# EAGLE board SparkFun NEO-D9S-Panel (EAGLE 9.6.2), part 1 of 2
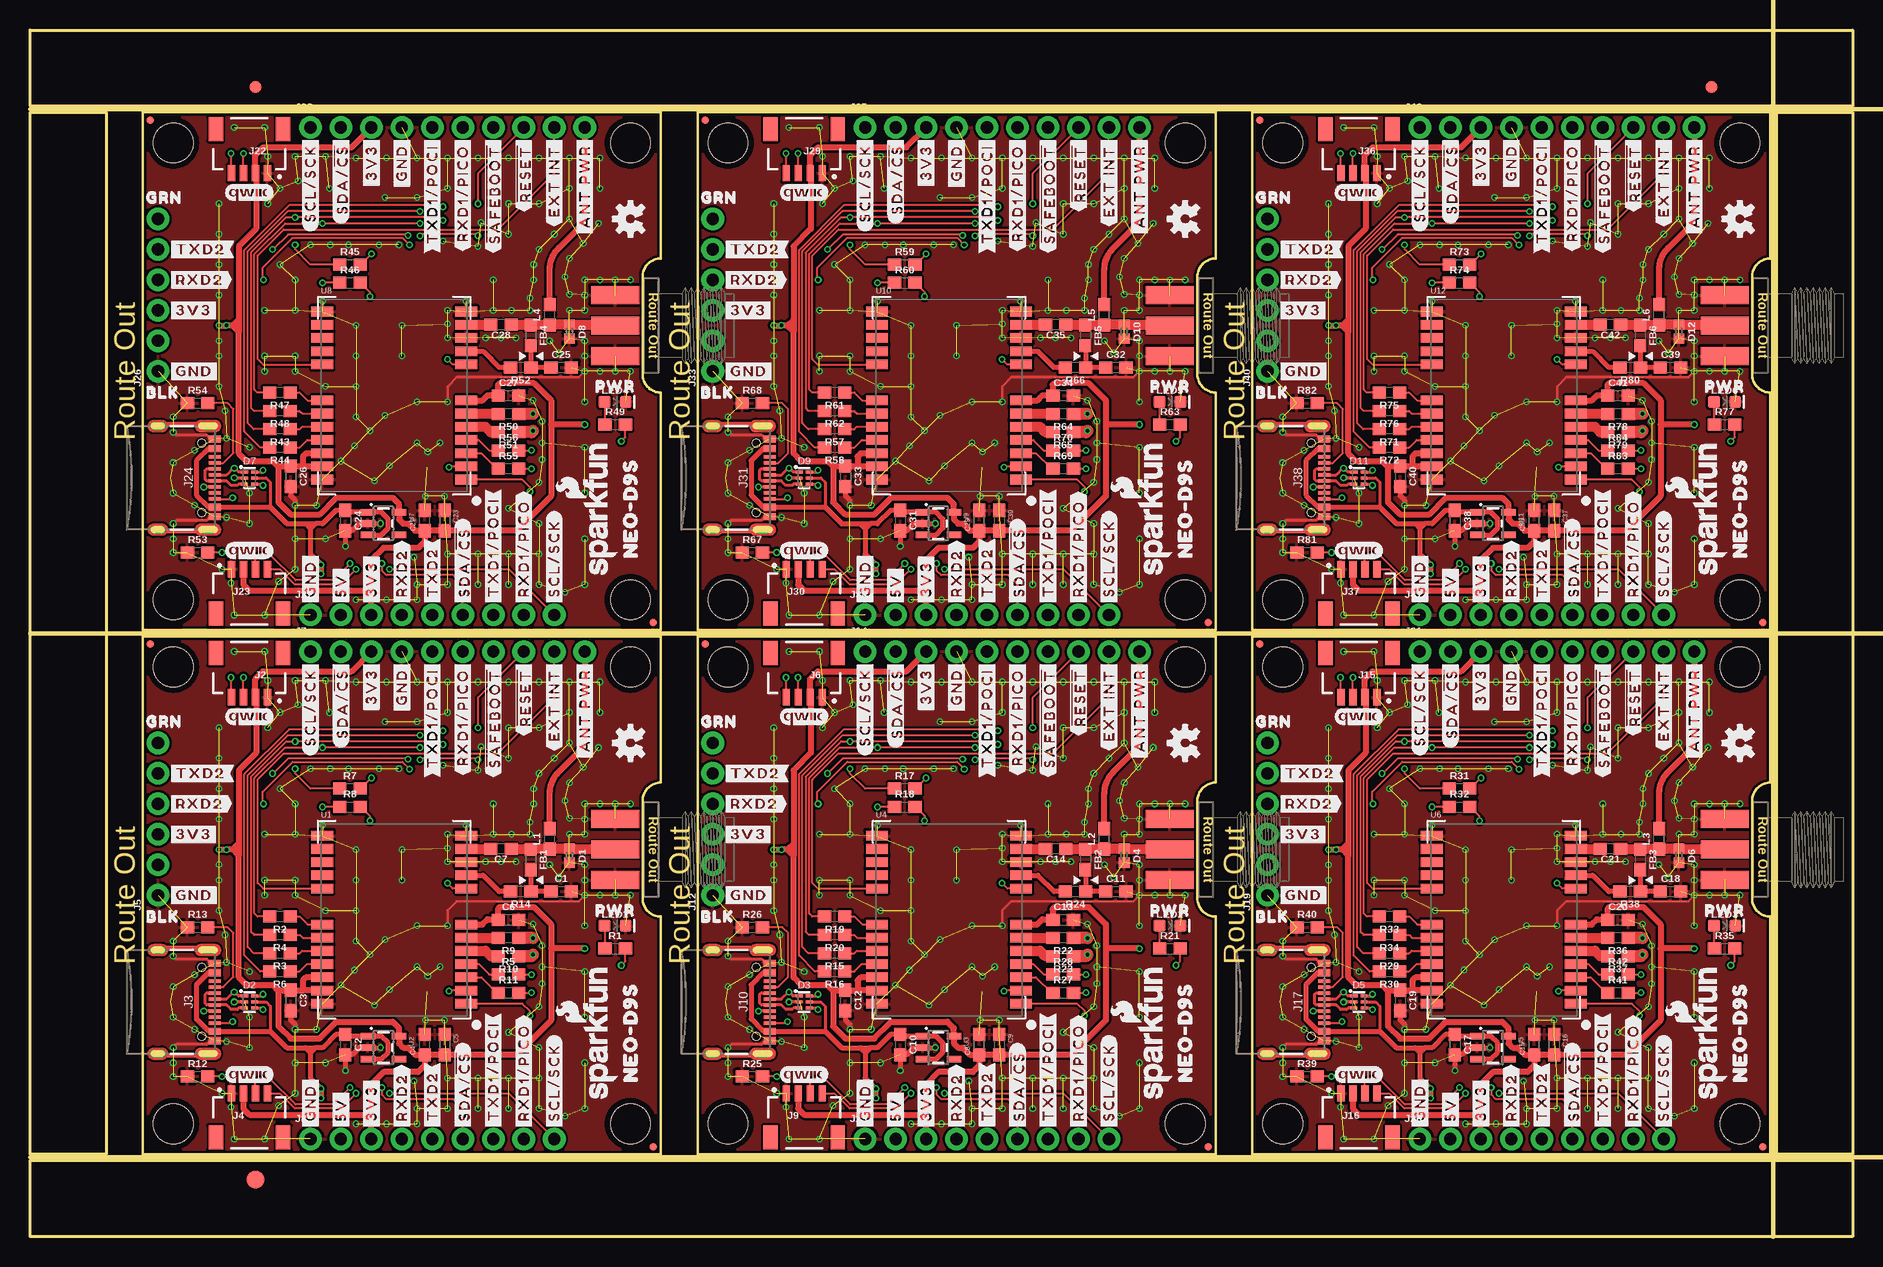
[diagram p0: board, top side]
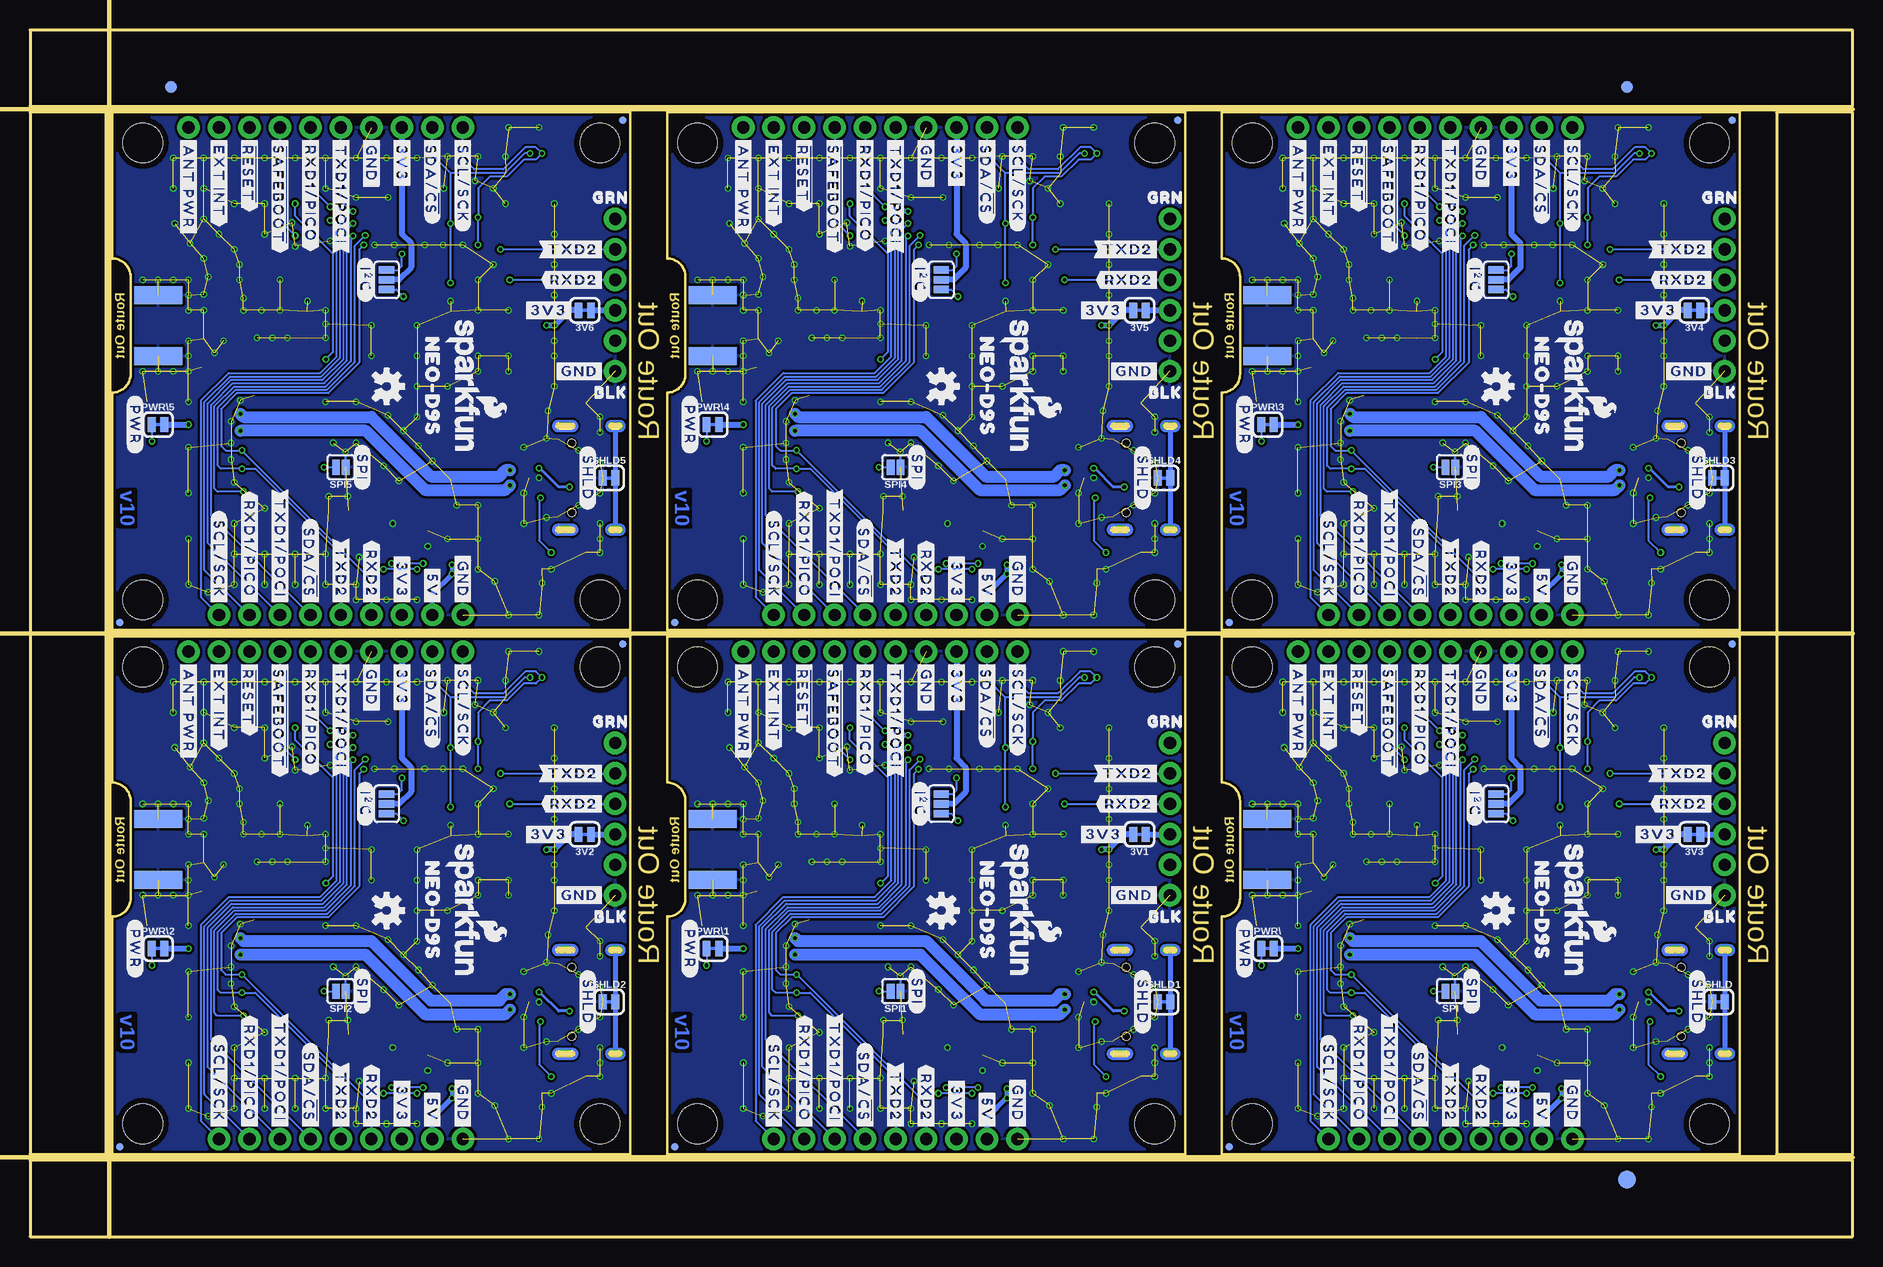
[diagram p1: board, bottom side, seen from below]

Size 151.89 x 100.58 mm. Coordinates in mm from the lower left corner, seen from the top.
Outline: 9.4,6.86 9.4,50.04 52.58,50.04 52.58,37.85 arc90 51.05,36.32 51.05,28.19 arc90 52.58,26.67 52.58,6.86 9.4,6.86
Outline: 55.63,6.86 55.63,50.04 98.81,50.04 98.81,37.85 arc90 97.28,36.32 97.28,28.19 arc90 98.81,26.67 98.81,6.86 55.63,6.86
Outline: 101.85,6.86 101.85,50.04 145.03,50.04 145.03,37.85 arc90 143.51,36.32 143.51,28.19 arc90 145.03,26.67 145.03,6.86 101.85,6.86
Outline: 9.4,50.55 9.4,93.73 52.58,93.73 52.58,81.53 arc90 51.05,80.01 51.05,71.88 arc90 52.58,70.36 52.58,50.55 9.4,50.55
Outline: 55.63,50.55 55.63,93.73 98.81,93.73 98.81,81.53 arc90 97.28,80.01 97.28,71.88 arc90 98.81,70.36 98.81,50.55 55.63,50.55
Outline: 101.85,50.55 101.85,93.73 145.03,93.73 145.03,81.53 arc90 143.51,80.01 143.51,71.88 arc90 145.03,70.36 145.03,50.55 101.85,50.55
Outline: 0,6.35 151.89,6.35 151.89,0 0,0 0,6.35
Outline: 145.54,93.73 151.89,93.73 151.89,6.86 145.54,6.86 145.54,93.73
Outline: 0,100.58 151.89,100.58 151.89,94.23 0,94.23 0,100.58
Outline: 0,93.73 6.35,93.73 6.35,6.86 0,6.86 0,93.73
Copper layers (1*16): Top 0.035mm / dielectric 1.5mm / Bottom 0.035mm
Design rules "SparkFun NEO-D9S": minimum track width 5mil, minimum drill 0.3mm, track to track 5mil, track to pad 5mil, pad to pad 5mil, via to via 5mil, smd to smd 5mil, copper to edge 7mil, drill to drill 7mil, minimum pad ring 5mil, minimum via ring 5mil, stop-mask expansion 2.5mil, vias tented up to drill 25mil, thermal gap 10mil
Net classes: 2 3.3V: width 0.508 mm
tRestrict: 12 lines
Milling: 4 lines

## Footprints (pad centres in the part's own frame; a part is rotated, then mirrored left to right if it is on the bottom)
SMT-JUMPER_2_NC_TRACE_SILK = smd 0.66 x 1.27: 1 -0.521,0; 2 0.521,0
0603 = smd 1.1 x 1: 1 -0.85,0; 2 0.85,0
0402 = smd 0.85 x 0.9: 1 -0.58,0; 2 0.58,0
SOT886 = smd 0.61 x 0.25: 1 -0.405,0.5 | smd 0.56 x 0.25: 2 -0.43,0; 3 -0.43,-0.5; 4 0.43,-0.5; 5 0.43,0; 6 0.43,0.5
FIDUCIAL-1X2 = smd 1 x 1: 1 0,0
FIDUCIAL-1.5X3 = smd 1.5 x 1.5: 1 0,0
SMT-JUMPER_3_NO_SILK = smd 0.635 x 1.27: 1 -0.813,0; 2 0,0; 3 0.813,0
SMA-EDGE = smd 1.5 x 4: GND@0 -2.54,0; GND@1 2.54,0; SIG 0,0 | smd 1.5 x 4 bottom: GND@2 -2.54,0; GND@3 2.54,0
JST04_1MM_RA = smd 0.6 x 1.35: 1 -1.5,0; 2 -0.5,0; 3 0.5,0; 4 1.5,0 | smd 1.2 x 2: NC1 2.8,-3.675; NC2 -2.8,-3.675
USB-C-16P-2LAYER-PADS = smd 0.3 x 1: A5 -1.25,-0.34; A6 -0.25,-0.34; A7 0.25,-0.34; A8 1.25,-0.34; B5 1.75,-0.34; B6 0.75,-0.34; B7 -0.75,-0.34; B8 -1.75,-0.34 | smd 0.6 x 1: GND -3.225,-0.34; GND2 3.225,-0.34; VBUS1 -2.45,-0.34; VBUS2 2.45,-0.34 | drill 0.4 pad 0.6 long: SHLD1 -4.318,-0.915; SHLD2 4.318,-0.915; SHLD3 -4.318,-5.095; SHLD4 4.318,-5.095 | hole 0.65: -2.89,-1.445; 2.89,-1.445
1X06_NO_SILK = drill 1.016 pad 1.88: 1 0,0; 2 2.54,0; 3 5.08,0; 4 7.62,0; 5 10.16,0; 6 12.7,0
1X10_NO_SILK = drill 1.016 pad 1.88: 1 0,0; 2 2.54,0; 3 5.08,0; 4 7.62,0; 5 10.16,0; 6 12.7,0; 7 15.24,0; 8 17.78,0; 9 20.32,0; 10 22.86,0
1X09_NO_SILK = drill 1.016 pad 1.88: 1 0,0; 2 2.54,0; 3 5.08,0; 4 7.62,0; 5 10.16,0; 6 12.7,0; 7 15.24,0; 8 17.78,0; 9 20.32,0
STAND-OFF = hole 3.302: 0,0
MICRO-FIDUCIAL = smd 0.635 x 0.635: 1 0,0
0603_NO-CREAM = smd 1.1 x 1: 1 -0.85,0; 2 0.85,0
LED-0603 = smd 1 x 1: A -0.877,0; C 0.877,0
SMT-JUMPER_2_NO_SILK = smd 0.635 x 1.27: 1 -0.406,0; 2 0.406,0
NEO-M9N/M8T/M8U/D9S = smd 1.8 x 0.8: 1 6,-7; 2 6,-5.9; 3 6,-4.8; 4 6,-3.7; 5 6,-2.6; 6 6,-1.5; 7 6,-0.4; 8 6,2.6; 9 6,3.7; 10 6,4.8; 11 6,5.9; 12 6,7; 13 -6,7; 14 -6,5.9; 15 -6,4.8; 16 -6,3.7; 17 -6,2.6; 18 -6,-0.4; 19 -6,-1.5; 20 -6,-2.6; 21 -6,-3.7; 22 -6,-4.8; 23 -6,-5.9; 24 -6,-7
SOT23-5 = smd 0.55 x 1.2: 1 -0.95,-1.3; 2 0,-1.3; 3 0.95,-1.3; 4 0.95,1.3; 5 -0.95,1.3

## Placement (x,y rotation side)
3V1  JUMPER-SMT_2_NC_TRACE_SILK  [SMT-JUMPER_2_NC_TRACE_SILK]  59.44,33.53 180 bottom
3V2  JUMPER-SMT_2_NC_TRACE_SILK  [SMT-JUMPER_2_NC_TRACE_SILK]  105.66,33.53 180 bottom
3V3  JUMPER-SMT_2_NC_TRACE_SILK  [SMT-JUMPER_2_NC_TRACE_SILK]  13.21,33.53 180 bottom
3V4  JUMPER-SMT_2_NC_TRACE_SILK  [SMT-JUMPER_2_NC_TRACE_SILK]  13.21,77.22 180 bottom
3V5  JUMPER-SMT_2_NC_TRACE_SILK  [SMT-JUMPER_2_NC_TRACE_SILK]  59.44,77.22 180 bottom
3V6  JUMPER-SMT_2_NC_TRACE_SILK  [SMT-JUMPER_2_NC_TRACE_SILK]  105.66,77.22 180 bottom
C1  47pF  [0603]  44.26,28.77 0 top
C2  1.0uF  [0603]  26.29,16 270 top
C3  1.0uF  [0603]  21.72,19.68 270 top
C4  1.0uF  [0603]  32.89,16 90 top
C5  0.1uF  [0603]  34.54,16 270 top
C6  1.0uF  [0603]  39.88,26.42 0 top
C7  47pF  [0603]  39.24,32.32 180 top
C8  1.0uF  [0603]  79.12,16 90 top
C9  0.1uF  [0603]  80.77,16 270 top
C10  1.0uF  [0603]  72.52,16 270 top
C11  47pF  [0603]  90.49,28.77 0 top
C12  1.0uF  [0603]  67.94,19.68 270 top
C13  1.0uF  [0603]  86.11,26.42 0 top
C14  47pF  [0603]  85.47,32.32 180 top
C15  1.0uF  [0603]  125.35,16 90 top
C16  0.1uF  [0603]  127,16 270 top
C17  1.0uF  [0603]  118.74,16 270 top
C18  47pF  [0603]  136.72,28.77 0 top
C19  1.0uF  [0603]  114.17,19.68 270 top
C20  1.0uF  [0603]  132.33,26.42 0 top
C21  47pF  [0603]  131.7,32.32 180 top
C22  1.0uF  [0603]  32.89,59.69 90 top
C23  0.1uF  [0603]  34.54,59.69 270 top
C24  1.0uF  [0603]  26.29,59.69 270 top
C25  47pF  [0603]  44.26,72.45 0 top
C26  1.0uF  [0603]  21.72,63.37 270 top
C27  1.0uF  [0603]  39.88,70.1 0 top
C28  47pF  [0603]  39.24,76.01 180 top
C29  1.0uF  [0603]  79.12,59.69 90 top
C30  0.1uF  [0603]  80.77,59.69 270 top
C31  1.0uF  [0603]  72.52,59.69 270 top
C32  47pF  [0603]  90.49,72.45 0 top
C33  1.0uF  [0603]  67.94,63.37 270 top
C34  1.0uF  [0603]  86.11,70.1 0 top
C35  47pF  [0603]  85.47,76.01 180 top
C36  1.0uF  [0603]  125.35,59.69 90 top
C37  0.1uF  [0603]  127,59.69 270 top
C38  1.0uF  [0603]  118.74,59.69 270 top
C39  47pF  [0603]  136.72,72.45 0 top
C40  1.0uF  [0603]  114.17,63.37 270 top
C41  1.0uF  [0603]  132.33,70.1 0 top
C42  47pF  [0603]  131.7,76.01 180 top
D1  PESD0402-0402  [0402]  44.96,31.75 270 top
D2  PRTR5V0U2F  [SOT886]  18.29,19.56 0 top
D3  PRTR5V0U2F  [SOT886]  64.52,19.56 0 top
D4  PESD0402-0402  [0402]  91.19,31.75 270 top
D5  PRTR5V0U2F  [SOT886]  110.74,19.56 0 top
D6  PESD0402-0402  [0402]  137.41,31.75 270 top
D7  PRTR5V0U2F  [SOT886]  18.29,63.25 0 top
D8  PESD0402-0402  [0402]  44.96,75.44 270 top
D9  PRTR5V0U2F  [SOT886]  64.52,63.25 0 top
D10  PESD0402-0402  [0402]  91.19,75.44 270 top
D11  PRTR5V0U2F  [SOT886]  110.74,63.25 0 top
D12  PESD0402-0402  [0402]  137.41,75.44 270 top
E$1  [FIDUCIAL-1X2]  18.8,95.82 0 top
E$2  [FIDUCIAL-1X2]  18.8,95.82 0 bottom
E$3  [FIDUCIAL-1X2]  140.14,95.82 0 top
E$4  [FIDUCIAL-1X2]  140.14,95.82 0 bottom
E$5  [FIDUCIAL-1.5X3]  18.8,4.76 0 top
E$6  [FIDUCIAL-1.5X3]  18.8,4.76 0 bottom
FB1  30Ω/1.8A  [0603]  41.72,31.43 270 top
FB2  30Ω/1.8A  [0603]  87.95,31.43 270 top
FB3  30Ω/1.8A  [0603]  134.18,31.43 270 top
FB4  30Ω/1.8A  [0603]  41.72,75.12 270 top
FB5  30Ω/1.8A  [0603]  87.95,75.12 270 top
FB6  30Ω/1.8A  [0603]  134.18,75.12 270 top
I2C  JUMPER-SMT_3_NO_SILK  [SMT-JUMPER_3_NO_SILK]  29.72,36.07 90 bottom
I2C1  JUMPER-SMT_3_NO_SILK  [SMT-JUMPER_3_NO_SILK]  75.95,36.07 90 bottom
I2C2  JUMPER-SMT_3_NO_SILK  [SMT-JUMPER_3_NO_SILK]  122.17,36.07 90 bottom
I2C3  JUMPER-SMT_3_NO_SILK  [SMT-JUMPER_3_NO_SILK]  29.72,79.76 90 bottom
I2C4  JUMPER-SMT_3_NO_SILK  [SMT-JUMPER_3_NO_SILK]  75.95,79.76 90 bottom
I2C5  JUMPER-SMT_3_NO_SILK  [SMT-JUMPER_3_NO_SILK]  122.17,79.76 90 bottom
J1  ANTENNA-SMA-GROUNDEDEDGE_SMA  [SMA-EDGE]  48.77,32.26 270 top
J2  Qwiic Right Angle  [JST04_1MM_RA]  18.29,44.96 180 top
J3  [USB-C-16P-2LAYER-PADS]  15.75,19.56 270 top
J4  Qwiic Right Angle  [JST04_1MM_RA]  18.29,11.94 0 top
J5  [1X06_NO_SILK]  10.67,28.45 90 top
J6  Qwiic Right Angle  [JST04_1MM_RA]  64.52,44.96 180 top
J7  [1X10_NO_SILK]  23.37,48.77 0 top
J8  [1X09_NO_SILK]  23.37,8.13 0 top
J9  Qwiic Right Angle  [JST04_1MM_RA]  64.52,11.94 0 top
J10  [USB-C-16P-2LAYER-PADS]  61.98,19.56 270 top
J11  ANTENNA-SMA-GROUNDEDEDGE_SMA  [SMA-EDGE]  95,32.26 270 top
J12  [1X06_NO_SILK]  56.9,28.45 90 top
J13  [1X09_NO_SILK]  69.6,8.13 0 top
J14  [1X10_NO_SILK]  69.6,48.77 0 top
J15  Qwiic Right Angle  [JST04_1MM_RA]  110.74,44.96 180 top
J16  Qwiic Right Angle  [JST04_1MM_RA]  110.74,11.94 0 top
J17  [USB-C-16P-2LAYER-PADS]  108.2,19.56 270 top
J18  ANTENNA-SMA-GROUNDEDEDGE_SMA  [SMA-EDGE]  141.22,32.26 270 top
J19  [1X06_NO_SILK]  103.12,28.45 90 top
J20  [1X09_NO_SILK]  115.82,8.13 0 top
J21  [1X10_NO_SILK]  115.82,48.77 0 top
J22  Qwiic Right Angle  [JST04_1MM_RA]  18.29,88.65 180 top
J23  Qwiic Right Angle  [JST04_1MM_RA]  18.29,55.63 0 top
J24  [USB-C-16P-2LAYER-PADS]  15.75,63.25 270 top
J25  ANTENNA-SMA-GROUNDEDEDGE_SMA  [SMA-EDGE]  48.77,75.95 270 top
J26  [1X06_NO_SILK]  10.67,72.14 90 top
J27  [1X09_NO_SILK]  23.37,51.82 0 top
J28  [1X10_NO_SILK]  23.37,92.46 0 top
J29  Qwiic Right Angle  [JST04_1MM_RA]  64.52,88.65 180 top
J30  Qwiic Right Angle  [JST04_1MM_RA]  64.52,55.63 0 top
J31  [USB-C-16P-2LAYER-PADS]  61.98,63.25 270 top
J32  ANTENNA-SMA-GROUNDEDEDGE_SMA  [SMA-EDGE]  95,75.95 270 top
J33  [1X06_NO_SILK]  56.9,72.14 90 top
J34  [1X09_NO_SILK]  69.6,51.82 0 top
J35  [1X10_NO_SILK]  69.6,92.46 0 top
J36  Qwiic Right Angle  [JST04_1MM_RA]  110.74,88.65 180 top
J37  Qwiic Right Angle  [JST04_1MM_RA]  110.74,55.63 0 top
J38  [USB-C-16P-2LAYER-PADS]  108.2,63.25 270 top
J39  ANTENNA-SMA-GROUNDEDEDGE_SMA  [SMA-EDGE]  141.22,75.95 270 top
J40  [1X06_NO_SILK]  103.12,72.14 90 top
J41  [1X09_NO_SILK]  115.82,51.82 0 top
J42  [1X10_NO_SILK]  115.82,92.46 0 top
JP1  STAND-OFF  [STAND-OFF]  58.17,47.47 0 top
JP2  STAND-OFF  [STAND-OFF]  96.27,47.47 0 top
JP3  FIDUCIALUFIDUCIAL  [MICRO-FIDUCIAL]  98.17,7.49 0 top
JP4  FIDUCIALUFIDUCIAL  [MICRO-FIDUCIAL]  56.26,49.38 0 top
JP5  FIDUCIALUFIDUCIAL  [MICRO-FIDUCIAL]  98.17,7.49 0 bottom
JP6  FIDUCIALUFIDUCIAL  [MICRO-FIDUCIAL]  56.26,49.38 0 bottom
JP7  STAND-OFF  [STAND-OFF]  58.17,9.4 0 top
JP8  STAND-OFF  [STAND-OFF]  96.27,9.4 0 top
JP9  STAND-OFF  [STAND-OFF]  104.39,47.47 0 top
JP10  STAND-OFF  [STAND-OFF]  142.49,47.47 0 top
JP11  FIDUCIALUFIDUCIAL  [MICRO-FIDUCIAL]  144.4,7.49 0 top
JP12  FIDUCIALUFIDUCIAL  [MICRO-FIDUCIAL]  102.49,49.38 0 top
JP13  FIDUCIALUFIDUCIAL  [MICRO-FIDUCIAL]  144.4,7.49 0 bottom
JP14  FIDUCIALUFIDUCIAL  [MICRO-FIDUCIAL]  102.49,49.38 0 bottom
JP15  STAND-OFF  [STAND-OFF]  104.39,9.4 0 top
JP16  STAND-OFF  [STAND-OFF]  142.49,9.4 0 top
JP17  STAND-OFF  [STAND-OFF]  11.94,91.16 0 top
JP18  STAND-OFF  [STAND-OFF]  50.04,91.16 0 top
JP19  FIDUCIALUFIDUCIAL  [MICRO-FIDUCIAL]  51.94,51.18 0 top
JP20  FIDUCIALUFIDUCIAL  [MICRO-FIDUCIAL]  10.03,93.07 0 top
JP21  FIDUCIALUFIDUCIAL  [MICRO-FIDUCIAL]  51.94,7.49 0 top
JP22  FIDUCIALUFIDUCIAL  [MICRO-FIDUCIAL]  51.94,51.18 0 bottom
JP23  FIDUCIALUFIDUCIAL  [MICRO-FIDUCIAL]  10.03,93.07 0 bottom
JP24  STAND-OFF  [STAND-OFF]  11.94,53.09 0 top
JP25  STAND-OFF  [STAND-OFF]  50.04,53.09 0 top
JP26  STAND-OFF  [STAND-OFF]  58.17,91.16 0 top
JP27  STAND-OFF  [STAND-OFF]  96.27,91.16 0 top
JP28  FIDUCIALUFIDUCIAL  [MICRO-FIDUCIAL]  98.17,51.18 0 top
JP29  FIDUCIALUFIDUCIAL  [MICRO-FIDUCIAL]  56.26,93.07 0 top
JP30  FIDUCIALUFIDUCIAL  [MICRO-FIDUCIAL]  98.17,51.18 0 bottom
JP31  STAND-OFF  [STAND-OFF]  11.94,47.47 0 top
JP32  FIDUCIALUFIDUCIAL  [MICRO-FIDUCIAL]  56.26,93.07 0 bottom
JP33  STAND-OFF  [STAND-OFF]  58.17,53.09 0 top
JP34  STAND-OFF  [STAND-OFF]  96.27,53.09 0 top
JP35  STAND-OFF  [STAND-OFF]  104.39,91.16 0 top
JP36  STAND-OFF  [STAND-OFF]  142.49,91.16 0 top
JP37  FIDUCIALUFIDUCIAL  [MICRO-FIDUCIAL]  144.4,51.18 0 top
JP38  FIDUCIALUFIDUCIAL  [MICRO-FIDUCIAL]  102.49,93.07 0 top
JP39  FIDUCIALUFIDUCIAL  [MICRO-FIDUCIAL]  144.4,51.18 0 bottom
JP40  FIDUCIALUFIDUCIAL  [MICRO-FIDUCIAL]  102.49,93.07 0 bottom
JP41  STAND-OFF  [STAND-OFF]  50.04,47.47 0 top
JP42  STAND-OFF  [STAND-OFF]  104.39,53.09 0 top
JP43  STAND-OFF  [STAND-OFF]  142.49,53.09 0 top
JP61  FIDUCIALUFIDUCIAL  [MICRO-FIDUCIAL]  10.03,49.38 0 top
JP71  FIDUCIALUFIDUCIAL  [MICRO-FIDUCIAL]  51.94,7.49 0 bottom
JP81  FIDUCIALUFIDUCIAL  [MICRO-FIDUCIAL]  10.03,49.38 0 bottom
JP91  STAND-OFF  [STAND-OFF]  11.94,9.4 0 top
JP101  STAND-OFF  [STAND-OFF]  50.04,9.4 0 top
L1  DNP  [0603_NO-CREAM]  43.31,33.15 90 top
L2  DNP  [0603_NO-CREAM]  89.53,33.15 90 top
L3  DNP  [0603_NO-CREAM]  135.76,33.15 90 top
L4  DNP  [0603_NO-CREAM]  43.31,76.84 90 top
L5  DNP  [0603_NO-CREAM]  89.53,76.84 90 top
L6  DNP  [0603_NO-CREAM]  135.76,76.84 90 top
LED1  RED  [LED-0603]  48.77,25.91 0 top
LED2  RED  [LED-0603]  95,25.91 0 top
LED3  RED  [LED-0603]  141.22,25.91 0 top
LED4  RED  [LED-0603]  48.77,69.6 0 top
LED5  RED  [LED-0603]  95,69.6 0 top
LED6  RED  [LED-0603]  141.22,69.6 0 top
LOGO1  OSHW-LOGOS  [OSHW-LOGO-S]  50.04,41.15 90 top
LOGO2  SFE_LOGO_NAME_FLAME.1_INCH  [SFE_LOGO_NAME_FLAME_.1]  23.37,27.18 270 bottom
LOGO3  SFE_LOGO_NAME_FLAME.1_INCH  [SFE_LOGO_NAME_FLAME_.1]  47.5,17.02 90 top
LOGO4  OSHW-LOGOS  [OSHW-LOGO-S]  29.72,27.18 270 bottom
LOGO5  OSHW-LOGOS  [OSHW-LOGO-S]  96.27,41.15 90 top
LOGO6  SFE_LOGO_NAME_FLAME.1_INCH  [SFE_LOGO_NAME_FLAME_.1]  93.73,17.02 90 top
LOGO7  SFE_LOGO_NAME_FLAME.1_INCH  [SFE_LOGO_NAME_FLAME_.1]  69.6,27.18 270 bottom
LOGO8  OSHW-LOGOS  [OSHW-LOGO-S]  75.95,27.18 270 bottom
LOGO9  OSHW-LOGOS  [OSHW-LOGO-S]  142.49,41.15 90 top
LOGO10  SFE_LOGO_NAME_FLAME.1_INCH  [SFE_LOGO_NAME_FLAME_.1]  139.95,17.02 90 top
LOGO11  SFE_LOGO_NAME_FLAME.1_INCH  [SFE_LOGO_NAME_FLAME_.1]  115.82,27.18 270 bottom
LOGO12  OSHW-LOGOS  [OSHW-LOGO-S]  122.17,27.18 270 bottom
LOGO13  OSHW-LOGOS  [OSHW-LOGO-S]  50.04,84.84 90 top
LOGO14  SFE_LOGO_NAME_FLAME.1_INCH  [SFE_LOGO_NAME_FLAME_.1]  47.5,60.71 90 top
LOGO15  SFE_LOGO_NAME_FLAME.1_INCH  [SFE_LOGO_NAME_FLAME_.1]  23.37,70.87 270 bottom
LOGO16  OSHW-LOGOS  [OSHW-LOGO-S]  29.72,70.87 270 bottom
LOGO17  OSHW-LOGOS  [OSHW-LOGO-S]  96.27,84.84 90 top
LOGO18  SFE_LOGO_NAME_FLAME.1_INCH  [SFE_LOGO_NAME_FLAME_.1]  93.73,60.71 90 top
LOGO19  SFE_LOGO_NAME_FLAME.1_INCH  [SFE_LOGO_NAME_FLAME_.1]  69.6,70.87 270 bottom
LOGO20  OSHW-LOGOS  [OSHW-LOGO-S]  75.95,70.87 270 bottom
LOGO21  OSHW-LOGOS  [OSHW-LOGO-S]  142.49,84.84 90 top
LOGO22  SFE_LOGO_NAME_FLAME.1_INCH  [SFE_LOGO_NAME_FLAME_.1]  139.95,60.71 90 top
LOGO23  SFE_LOGO_NAME_FLAME.1_INCH  [SFE_LOGO_NAME_FLAME_.1]  115.82,70.87 270 bottom
LOGO24  OSHW-LOGOS  [OSHW-LOGO-S]  122.17,70.87 270 bottom
PWR\  JUMPER-SMT_2_NC_TRACE_SILK  [SMT-JUMPER_2_NC_TRACE_SILK]  48.77,24 0 bottom
PWR\1  JUMPER-SMT_2_NC_TRACE_SILK  [SMT-JUMPER_2_NC_TRACE_SILK]  95,24 0 bottom
PWR\2  JUMPER-SMT_2_NC_TRACE_SILK  [SMT-JUMPER_2_NC_TRACE_SILK]  141.22,24 0 bottom
PWR\3  JUMPER-SMT_2_NC_TRACE_SILK  [SMT-JUMPER_2_NC_TRACE_SILK]  48.77,67.69 0 bottom
PWR\4  JUMPER-SMT_2_NC_TRACE_SILK  [SMT-JUMPER_2_NC_TRACE_SILK]  95,67.69 0 bottom
PWR\5  JUMPER-SMT_2_NC_TRACE_SILK  [SMT-JUMPER_2_NC_TRACE_SILK]  141.22,67.69 0 bottom
R1  1k  [0603]  48.77,24 0 top
R2  33  [0603]  20.83,26.67 180 top
R3  33  [0603]  20.83,23.62 180 top
R4  33  [0603]  20.83,25.15 180 top
R5  33  [0603]  39.88,21.84 0 top
R6  33  [0603]  20.83,22.1 180 top
R7  2.2k  [0603]  26.67,37.34 0 top
R8  2.2k  [0603]  26.67,35.81 0 top
R9  27  [0603]  39.88,24.89 180 top
R10  27  [0603]  39.88,23.37 180 top
R11  33  [0603]  39.88,20.32 0 top
R12  5.1k  [0603]  13.97,13.34 0 top
R13  5.1k  [0603]  13.97,25.78 0 top
R14  10  [0603]  40.89,28.77 180 top
R15  33  [0603]  67.06,23.62 180 top
R16  33  [0603]  67.06,22.1 180 top
R17  2.2k  [0603]  72.9,37.34 0 top
R18  2.2k  [0603]  72.9,35.81 0 top
R19  33  [0603]  67.06,26.67 180 top
R20  33  [0603]  67.06,25.15 180 top
R21  1k  [0603]  95,24 0 top
R22  27  [0603]  86.11,24.89 180 top
R23  27  [0603]  86.11,23.37 180 top
R24  10  [0603]  87.12,28.77 180 top
R25  5.1k  [0603]  60.2,13.34 0 top
R26  5.1k  [0603]  60.2,25.78 0 top
R27  33  [0603]  86.11,20.32 0 top
R28  33  [0603]  86.11,21.84 0 top
R29  33  [0603]  113.28,23.62 180 top
R30  33  [0603]  113.28,22.1 180 top
R31  2.2k  [0603]  119.13,37.34 0 top
R32  2.2k  [0603]  119.13,35.81 0 top
R33  33  [0603]  113.28,26.67 180 top
R34  33  [0603]  113.28,25.15 180 top
R35  1k  [0603]  141.22,24 0 top
R36  27  [0603]  132.33,24.89 180 top
R37  27  [0603]  132.33,23.37 180 top
R38  10  [0603]  133.35,28.77 180 top
R39  5.1k  [0603]  106.43,13.34 0 top
R40  5.1k  [0603]  106.43,25.78 0 top
R41  33  [0603]  132.33,20.32 0 top
R42  33  [0603]  132.33,21.84 0 top
R43  33  [0603]  20.83,67.31 180 top
R44  33  [0603]  20.83,65.79 180 top
R45  2.2k  [0603]  26.67,81.03 0 top
R46  2.2k  [0603]  26.67,79.5 0 top
R47  33  [0603]  20.83,70.36 180 top
R48  33  [0603]  20.83,68.83 180 top
R49  1k  [0603]  48.77,67.69 0 top
R50  27  [0603]  39.88,68.58 180 top
R51  27  [0603]  39.88,67.06 180 top
R52  10  [0603]  40.89,72.45 180 top
R53  5.1k  [0603]  13.97,57.02 0 top
R54  5.1k  [0603]  13.97,69.47 0 top
R55  33  [0603]  39.88,64.01 0 top
R56  33  [0603]  39.88,65.53 0 top
R57  33  [0603]  67.06,67.31 180 top
R58  33  [0603]  67.06,65.79 180 top
R59  2.2k  [0603]  72.9,81.03 0 top
R60  2.2k  [0603]  72.9,79.5 0 top
R61  33  [0603]  67.06,70.36 180 top
R62  33  [0603]  67.06,68.83 180 top
R63  1k  [0603]  95,67.69 0 top
R64  27  [0603]  86.11,68.58 180 top
R65  27  [0603]  86.11,67.06 180 top
R66  10  [0603]  87.12,72.45 180 top
R67  5.1k  [0603]  60.2,57.02 0 top
R68  5.1k  [0603]  60.2,69.47 0 top
R69  33  [0603]  86.11,64.01 0 top
R70  33  [0603]  86.11,65.53 0 top
R71  33  [0603]  113.28,67.31 180 top
R72  33  [0603]  113.28,65.79 180 top
R73  2.2k  [0603]  119.13,81.03 0 top
R74  2.2k  [0603]  119.13,79.5 0 top
R75  33  [0603]  113.28,70.36 180 top
R76  33  [0603]  113.28,68.83 180 top
R77  1k  [0603]  141.22,67.69 0 top
R78  27  [0603]  132.33,68.58 180 top
R79  27  [0603]  132.33,67.06 180 top
R80  10  [0603]  133.35,72.45 180 top
R81  5.1k  [0603]  106.43,57.02 0 top
R82  5.1k  [0603]  106.43,69.47 0 top
R83  33  [0603]  132.33,64.01 0 top
R84  33  [0603]  132.33,65.53 0 top
SHLD  JUMPER-SMT_2_NC_TRACE_SILK  [SMT-JUMPER_2_NC_TRACE_SILK]  11.18,19.56 0 bottom
SHLD1  JUMPER-SMT_2_NC_TRACE_SILK  [SMT-JUMPER_2_NC_TRACE_SILK]  57.4,19.56 0 bottom
SHLD2  JUMPER-SMT_2_NC_TRACE_SILK  [SMT-JUMPER_2_NC_TRACE_SILK]  103.63,19.56 0 bottom
SHLD3  JUMPER-SMT_2_NC_TRACE_SILK  [SMT-JUMPER_2_NC_TRACE_SILK]  11.18,63.25 0 bottom
SHLD4  JUMPER-SMT_2_NC_TRACE_SILK  [SMT-JUMPER_2_NC_TRACE_SILK]  57.4,63.25 0 bottom
SHLD5  JUMPER-SMT_2_NC_TRACE_SILK  [SMT-JUMPER_2_NC_TRACE_SILK]  103.63,63.25 0 bottom
SPI  JUMPER-SMT_2_NO_SILK  [SMT-JUMPER_2_NO_SILK]  33.53,20.45 180 bottom
SPI1  JUMPER-SMT_2_NO_SILK  [SMT-JUMPER_2_NO_SILK]  79.76,20.45 180 bottom
SPI2  JUMPER-SMT_2_NO_SILK  [SMT-JUMPER_2_NO_SILK]  125.98,20.45 180 bottom
SPI3  JUMPER-SMT_2_NO_SILK  [SMT-JUMPER_2_NO_SILK]  33.53,64.14 180 bottom
SPI4  JUMPER-SMT_2_NO_SILK  [SMT-JUMPER_2_NO_SILK]  79.76,64.14 180 bottom
SPI5  JUMPER-SMT_2_NO_SILK  [SMT-JUMPER_2_NO_SILK]  125.98,64.14 180 bottom
U1  U-BLOX_NEO-D9S-00B  [NEO-M9N/M8T/M8U/D9S]  30.35,26.42 0 top
U2  3.3V  [SOT23-5]  29.46,15.75 270 top
U3  3.3V  [SOT23-5]  75.69,15.75 270 top
U4  U-BLOX_NEO-D9S-00B  [NEO-M9N/M8T/M8U/D9S]  76.58,26.42 0 top
U5  3.3V  [SOT23-5]  121.92,15.75 270 top
U6  U-BLOX_NEO-D9S-00B  [NEO-M9N/M8T/M8U/D9S]  122.81,26.42 0 top
U7  3.3V  [SOT23-5]  29.46,59.44 270 top
U8  U-BLOX_NEO-D9S-00B  [NEO-M9N/M8T/M8U/D9S]  30.35,70.1 0 top
U9  3.3V  [SOT23-5]  75.69,59.44 270 top
U10  U-BLOX_NEO-D9S-00B  [NEO-M9N/M8T/M8U/D9S]  76.58,70.1 0 top
U11  3.3V  [SOT23-5]  121.92,59.44 270 top
U12  U-BLOX_NEO-D9S-00B  [NEO-M9N/M8T/M8U/D9S]  122.81,70.1 0 top
U$1  [#GND#0]  23.37,8.89 90 top
U$2  [#GND#0]  11.43,28.45 0 top
U$3  [#GND#0]  30.99,48.01 270 bottom
U$4  [#GND#1]  30.99,48.01 90 top
U$5  [#GND#1]  11.43,28.45 0 bottom
U$6  [#GND#1]  23.37,8.89 270 bottom
U$7  [#TXD2#0]  11.43,38.61 0 top
U$8  [#TXD2#0]  33.53,8.89 90 top
U$9  [#TXD2#3]  33.53,8.89 270 bottom
U$10  [#TXD2#3]  11.43,38.61 0 bottom
U$11  [#RXD2#0]  30.99,8.89 90 top
U$12  [#RXD2#0]  11.43,36.07 0 top
U$13  [#RXD2#3]  11.43,36.07 0 bottom
U$14  [QWIIC_4MM]  18.29,13.49 0 top
U$15  [#RXD2#3]  30.99,8.89 270 bottom
U$16  [BLK0]  11.05,26.67 0 top
U$17  [BLK0]  11.05,26.67 0 bottom
U$18  [GRN0]  11.18,42.93 0 top
U$19  [GRN0]  11.05,42.93 0 bottom
U$20  [#5V#0]  25.91,8.89 90 top
U$21  [#5V#6]  25.91,8.89 270 bottom
U$22  [#3V3#0]  28.45,8.89 90 top
U$23  [#3V3#0]  28.45,48.01 270 bottom
U$24  [#3V3#4]  28.45,8.89 270 bottom
U$25  [#3V3#4]  28.45,48.01 90 top
U$26  [#SDA##CS##0]  36.07,8.89 90 top
U$27  [#SDA##CS##0]  25.91,48.01 270 bottom
U$28  [#SDA##CS##1]  36.07,8.89 270 bottom
U$29  [#SDA##CS##1]  25.91,48.01 90 top
U$30  [#TXD1#POCI#0]  38.61,8.89 90 top
U$31  [#TXD1#POCI#0]  33.53,48.01 270 bottom
U$32  [#TXD1#POCI#2]  33.53,48.01 90 top
U$33  [#TXD1#POCI#2]  38.61,8.89 270 bottom
U$34  [#RXD1#PICO#0]  41.15,8.89 90 top
U$35  [#RXD1#PICO#0]  36.07,48.01 270 bottom
U$36  [#RXD1#PICO#2]  36.07,48.01 90 top
U$37  [#RXD1#PICO#2]  41.15,8.89 270 bottom
U$38  [QWIIC_4MM]  18.29,43.33 0 top
U$39  [#SCL#SCK#0]  43.69,8.89 90 top
U$40  [#SCL#SCK#0]  23.37,48.01 270 bottom
U$41  [#SCL#SCK#1]  23.37,48.01 90 top
U$42  [#SCL#SCK#1]  43.69,8.89 270 bottom
U$43  [##SAFEBOOT##0]  38.61,48.01 90 top
U$44  [##SAFEBOOT##1]  38.61,48.01 270 bottom
U$45  [##RESET##0]  41.15,48.01 90 top
U$46  [##RESET##1]  41.15,48.01 270 bottom
U$47  [#EXT_INT#0]  43.69,48.01 90 top
U$48  [#EXT_INT#1]  43.69,48.01 270 bottom
U$49  [PWR0]  48.77,27.18 0 top
U$50  [#PWR#0]  50.67,24 270 bottom
U$51  [#SPI#0]  31.75,20.45 270 bottom
U$52  [#I�C#0]  31.5,36.07 270 bottom
U$53  [#SHLD#0]  12.95,19.56 270 bottom
U$54  [NEO#D9S0]  50.04,17.02 90 top
U$55  [NEO#D9S0]  25.91,27.18 270 bottom
U$56  [#3V3#0]  11.43,33.53 0 top
U$57  [#3V3#0]  18.41,33.53 0 bottom
U$58  [#ANT_PWR#0]  46.23,48.01 90 top
U$59  [#ANT_PWR#1]  46.23,48.01 270 bottom
U$60  [QWIIC_4MM]  64.52,13.49 0 top
U$61  [#GND#0]  69.6,8.89 90 top
U$62  [#GND#0]  57.66,28.45 0 top
U$63  [#GND#0]  77.22,48.01 270 bottom
U$64  [#GND#1]  77.22,48.01 90 top
U$65  [#GND#1]  57.66,28.45 0 bottom
U$66  [#GND#1]  69.6,8.89 270 bottom
U$67  [#TXD2#0]  57.66,38.61 0 top
U$68  [#TXD2#0]  79.76,8.89 90 top
U$69  [#TXD2#3]  79.76,8.89 270 bottom
U$70  [#TXD2#3]  57.66,38.61 0 bottom
U$71  [#RXD2#0]  77.22,8.89 90 top
U$72  [#RXD2#0]  57.66,36.07 0 top
U$73  [#RXD2#3]  57.66,36.07 0 bottom
U$74  [#RXD2#3]  77.22,8.89 270 bottom
U$75  [BLK0]  57.28,26.67 0 top
U$76  [BLK0]  57.28,26.67 0 bottom
U$77  [GRN0]  57.4,42.93 0 top
U$78  [GRN0]  57.28,42.93 0 bottom
U$79  [#5V#0]  72.14,8.89 90 top
U$80  [#5V#6]  72.14,8.89 270 bottom
U$81  [#3V3#0]  74.68,8.89 90 top
U$82  [#3V3#0]  74.68,48.01 270 bottom
U$83  [#3V3#4]  74.68,8.89 270 bottom
U$84  [#3V3#4]  74.68,48.01 90 top
U$85  [#SDA##CS##0]  82.3,8.89 90 top
U$86  [#SDA##CS##0]  72.14,48.01 270 bottom
U$87  [#SDA##CS##1]  82.3,8.89 270 bottom
U$88  [#SDA##CS##1]  72.14,48.01 90 top
U$89  [#SCL#SCK#0]  89.92,8.89 90 top
U$90  [#SCL#SCK#0]  69.6,48.01 270 bottom
U$91  [#SCL#SCK#1]  69.6,48.01 90 top
U$92  [#SCL#SCK#1]  89.92,8.89 270 bottom
U$93  [##SAFEBOOT##0]  84.84,48.01 90 top
U$94  [##SAFEBOOT##1]  84.84,48.01 270 bottom
U$95  [##RESET##0]  87.38,48.01 90 top
U$96  [##RESET##1]  87.38,48.01 270 bottom
U$97  [#EXT_INT#0]  89.92,48.01 90 top
U$98  [#EXT_INT#1]  89.92,48.01 270 bottom
U$99  [PWR0]  95,27.18 0 top
U$100  [#PWR#0]  96.9,24 270 bottom
U$101  [#SPI#0]  77.98,20.45 270 bottom
U$102  [#I�C#0]  77.72,36.07 270 bottom
U$103  [#SHLD#0]  59.18,19.56 270 bottom
U$104  [NEO#D9S0]  96.27,17.02 90 top
U$105  [NEO#D9S0]  72.14,27.18 270 bottom
U$106  [#TXD1#POCI#0]  84.84,8.89 90 top
U$107  [#TXD1#POCI#0]  79.76,48.01 270 bottom
U$108  [#TXD1#POCI#2]  79.76,48.01 90 top
U$109  [#TXD1#POCI#2]  84.84,8.89 270 bottom
U$110  [#RXD1#PICO#0]  87.38,8.89 90 top
U$111  [#RXD1#PICO#0]  82.3,48.01 270 bottom
U$112  [#RXD1#PICO#2]  82.3,48.01 90 top
U$113  [#RXD1#PICO#2]  87.38,8.89 270 bottom
U$114  [QWIIC_4MM]  64.52,43.33 0 top
U$115  [#3V3#0]  57.66,33.53 0 top
U$116  [#3V3#0]  64.64,33.53 0 bottom
U$117  [#ANT_PWR#0]  92.46,48.01 90 top
U$118  [#ANT_PWR#1]  92.46,48.01 270 bottom
U$119  [QWIIC_4MM]  110.74,13.49 0 top
U$120  [#GND#0]  115.82,8.89 90 top
U$121  [#GND#0]  103.89,28.45 0 top
U$122  [#GND#0]  123.44,48.01 270 bottom
U$123  [#GND#1]  123.44,48.01 90 top
U$124  [#GND#1]  103.89,28.45 0 bottom
U$125  [#GND#1]  115.82,8.89 270 bottom
U$126  [#TXD2#0]  103.89,38.61 0 top
U$127  [#TXD2#0]  125.98,8.89 90 top
U$128  [#TXD2#3]  125.98,8.89 270 bottom
U$129  [#TXD2#3]  103.89,38.61 0 bottom
U$130  [#RXD2#0]  123.44,8.89 90 top
U$131  [#RXD2#0]  103.89,36.07 0 top
U$132  [#RXD2#3]  103.89,36.07 0 bottom
U$133  [#RXD2#3]  123.44,8.89 270 bottom
U$134  [BLK0]  103.5,26.67 0 top
U$135  [BLK0]  103.5,26.67 0 bottom
U$136  [GRN0]  103.63,42.93 0 top
U$137  [GRN0]  103.5,42.93 0 bottom
U$138  [#5V#0]  118.36,8.89 90 top
U$139  [#5V#6]  118.36,8.89 270 bottom
U$140  [#3V3#0]  120.9,8.89 90 top
U$141  [#3V3#0]  120.9,48.01 270 bottom
U$142  [#3V3#4]  120.9,8.89 270 bottom
U$143  [#3V3#4]  120.9,48.01 90 top
U$144  [#SDA##CS##0]  128.52,8.89 90 top
U$145  [#SDA##CS##0]  118.36,48.01 270 bottom
U$146  [#SDA##CS##1]  128.52,8.89 270 bottom
U$147  [#SDA##CS##1]  118.36,48.01 90 top
U$148  [#SCL#SCK#0]  136.14,8.89 90 top
U$149  [#SCL#SCK#0]  115.82,48.01 270 bottom
U$150  [#SCL#SCK#1]  115.82,48.01 90 top
U$151  [#SCL#SCK#1]  136.14,8.89 270 bottom
U$152  [##SAFEBOOT##0]  131.06,48.01 90 top
U$153  [##SAFEBOOT##1]  131.06,48.01 270 bottom
U$154  [##RESET##0]  133.6,48.01 90 top
U$155  [##RESET##1]  133.6,48.01 270 bottom
U$156  [#EXT_INT#0]  136.14,48.01 90 top
U$157  [#EXT_INT#1]  136.14,48.01 270 bottom
U$158  [PWR0]  141.22,27.18 0 top
U$159  [#PWR#0]  143.13,24 270 bottom
U$160  [#SPI#0]  124.21,20.45 270 bottom
U$161  [#I�C#0]  123.95,36.07 270 bottom
U$162  [#SHLD#0]  105.41,19.56 270 bottom
U$163  [NEO#D9S0]  142.49,17.02 90 top
U$164  [NEO#D9S0]  118.36,27.18 270 bottom
U$165  [#TXD1#POCI#0]  131.06,8.89 90 top
U$166  [#TXD1#POCI#0]  125.98,48.01 270 bottom
U$167  [#TXD1#POCI#2]  125.98,48.01 90 top
U$168  [#TXD1#POCI#2]  131.06,8.89 270 bottom
U$169  [#RXD1#PICO#0]  133.6,8.89 90 top
U$170  [#RXD1#PICO#0]  128.52,48.01 270 bottom
U$171  [#RXD1#PICO#2]  128.52,48.01 90 top
U$172  [#RXD1#PICO#2]  133.6,8.89 270 bottom
U$173  [QWIIC_4MM]  110.74,43.33 0 top
U$174  [#3V3#0]  103.89,33.53 0 top
U$175  [#3V3#0]  110.87,33.53 0 bottom
U$176  [#ANT_PWR#0]  138.68,48.01 90 top
U$177  [#ANT_PWR#1]  138.68,48.01 270 bottom
U$178  [QWIIC_4MM]  18.29,57.18 0 top
U$179  [#GND#0]  23.37,52.58 90 top
U$180  [#GND#0]  11.43,72.14 0 top
U$181  [#GND#0]  30.99,91.69 270 bottom
U$182  [#GND#1]  30.99,91.69 90 top
U$183  [#GND#1]  11.43,72.14 0 bottom
U$184  [#GND#1]  23.37,52.58 270 bottom
U$185  [#TXD2#0]  11.43,82.3 0 top
U$186  [#TXD2#0]  33.53,52.58 90 top
U$187  [#TXD2#3]  33.53,52.58 270 bottom
U$188  [#TXD2#3]  11.43,82.3 0 bottom
U$189  [#RXD2#0]  30.99,52.58 90 top
U$190  [#RXD2#0]  11.43,79.76 0 top
U$191  [#RXD2#3]  11.43,79.76 0 bottom
U$192  [#RXD2#3]  30.99,52.58 270 bottom
U$193  [BLK0]  11.05,70.36 0 top
U$194  [BLK0]  11.05,70.36 0 bottom
U$195  [GRN0]  11.18,86.61 0 top
U$196  [GRN0]  11.05,86.61 0 bottom
U$197  [#5V#0]  25.91,52.58 90 top
U$198  [#5V#6]  25.91,52.58 270 bottom
U$199  [#3V3#0]  28.45,52.58 90 top
U$200  [#3V3#0]  28.45,91.69 270 bottom
U$201  [#3V3#4]  28.45,52.58 270 bottom
U$202  [#3V3#4]  28.45,91.69 90 top
U$203  [#SDA##CS##0]  36.07,52.58 90 top
U$204  [#SDA##CS##0]  25.91,91.69 270 bottom
U$205  [#SDA##CS##1]  36.07,52.58 270 bottom
U$206  [#SDA##CS##1]  25.91,91.69 90 top
U$207  [#SCL#SCK#0]  43.69,52.58 90 top
U$208  [#SCL#SCK#0]  23.37,91.69 270 bottom
U$209  [#SCL#SCK#1]  23.37,91.69 90 top
U$210  [#SCL#SCK#1]  43.69,52.58 270 bottom
U$211  [##SAFEBOOT##0]  38.61,91.69 90 top
U$212  [##SAFEBOOT##1]  38.61,91.69 270 bottom
U$213  [##RESET##0]  41.15,91.69 90 top
U$214  [##RESET##1]  41.15,91.69 270 bottom
U$215  [#EXT_INT#0]  43.69,91.69 90 top
U$216  [#EXT_INT#1]  43.69,91.69 270 bottom
U$217  [PWR0]  48.77,70.87 0 top
U$218  [#PWR#0]  50.67,67.69 270 bottom
U$219  [#SPI#0]  31.75,64.14 270 bottom
U$220  [#I�C#0]  31.5,79.76 270 bottom
U$221  [#SHLD#0]  12.95,63.25 270 bottom
U$222  [NEO#D9S0]  50.04,60.71 90 top
U$223  [NEO#D9S0]  25.91,70.87 270 bottom
U$224  [#TXD1#POCI#0]  38.61,52.58 90 top
U$225  [#TXD1#POCI#0]  33.53,91.69 270 bottom
U$226  [#TXD1#POCI#2]  33.53,91.69 90 top
U$227  [#TXD1#POCI#2]  38.61,52.58 270 bottom
U$228  [#RXD1#PICO#0]  41.15,52.58 90 top
U$229  [#RXD1#PICO#0]  36.07,91.69 270 bottom
U$230  [#RXD1#PICO#2]  36.07,91.69 90 top
U$231  [#RXD1#PICO#2]  41.15,52.58 270 bottom
U$232  [QWIIC_4MM]  18.29,87.02 0 top
U$233  [#3V3#0]  11.43,77.22 0 top
U$234  [#3V3#0]  18.41,77.22 0 bottom
U$235  [#ANT_PWR#0]  46.23,91.69 90 top
U$236  [#ANT_PWR#1]  46.23,91.69 270 bottom
U$237  [QWIIC_4MM]  64.52,57.18 0 top
U$238  [#GND#0]  69.6,52.58 90 top
U$239  [#GND#0]  57.66,72.14 0 top
U$240  [#GND#0]  77.22,91.69 270 bottom
U$241  [#GND#1]  77.22,91.69 90 top
U$242  [#GND#1]  57.66,72.14 0 bottom
U$243  [#GND#1]  69.6,52.58 270 bottom
U$244  [#TXD2#0]  57.66,82.3 0 top
U$245  [#TXD2#0]  79.76,52.58 90 top
U$246  [#TXD2#3]  79.76,52.58 270 bottom
U$247  [#TXD2#3]  57.66,82.3 0 bottom
U$248  [#RXD2#0]  77.22,52.58 90 top
U$249  [#RXD2#0]  57.66,79.76 0 top
U$250  [#RXD2#3]  57.66,79.76 0 bottom
U$251  [#RXD2#3]  77.22,52.58 270 bottom
U$252  [BLK0]  57.28,70.36 0 top
U$253  [BLK0]  57.28,70.36 0 bottom
U$254  [GRN0]  57.4,86.61 0 top
U$255  [GRN0]  57.28,86.61 0 bottom
U$256  [#5V#0]  72.14,52.58 90 top
U$257  [#5V#6]  72.14,52.58 270 bottom
U$258  [#3V3#0]  74.68,52.58 90 top
U$259  [#3V3#0]  74.68,91.69 270 bottom
U$260  [#3V3#4]  74.68,52.58 270 bottom
U$261  [#3V3#4]  74.68,91.69 90 top
U$262  [#SDA##CS##0]  82.3,52.58 90 top
U$263  [#SDA##CS##0]  72.14,91.69 270 bottom
U$264  [#SDA##CS##1]  82.3,52.58 270 bottom
U$265  [#SDA##CS##1]  72.14,91.69 90 top
U$266  [#SCL#SCK#0]  89.92,52.58 90 top
U$267  [#SCL#SCK#0]  69.6,91.69 270 bottom
U$268  [#SCL#SCK#1]  69.6,91.69 90 top
U$269  [#SCL#SCK#1]  89.92,52.58 270 bottom
U$270  [##SAFEBOOT##0]  84.84,91.69 90 top
U$271  [##SAFEBOOT##1]  84.84,91.69 270 bottom
U$272  [##RESET##0]  87.38,91.69 90 top
U$273  [##RESET##1]  87.38,91.69 270 bottom
U$274  [#EXT_INT#0]  89.92,91.69 90 top
U$275  [#EXT_INT#1]  89.92,91.69 270 bottom
U$276  [PWR0]  95,70.87 0 top
U$277  [#PWR#0]  96.9,67.69 270 bottom
U$278  [#SPI#0]  77.98,64.14 270 bottom
U$279  [#I�C#0]  77.72,79.76 270 bottom
U$280  [#SHLD#0]  59.18,63.25 270 bottom
U$281  [NEO#D9S0]  96.27,60.71 90 top
U$282  [NEO#D9S0]  72.14,70.87 270 bottom
U$283  [#TXD1#POCI#0]  84.84,52.58 90 top
U$284  [#TXD1#POCI#0]  79.76,91.69 270 bottom
U$285  [#TXD1#POCI#2]  79.76,91.69 90 top
U$286  [#TXD1#POCI#2]  84.84,52.58 270 bottom
U$287  [#RXD1#PICO#0]  87.38,52.58 90 top
U$288  [#RXD1#PICO#0]  82.3,91.69 270 bottom
U$289  [#RXD1#PICO#2]  82.3,91.69 90 top
U$290  [#RXD1#PICO#2]  87.38,52.58 270 bottom
U$291  [QWIIC_4MM]  64.52,87.02 0 top
U$292  [#3V3#0]  57.66,77.22 0 top
U$293  [#3V3#0]  64.64,77.22 0 bottom
U$294  [#ANT_PWR#0]  92.46,91.69 90 top
U$295  [#ANT_PWR#1]  92.46,91.69 270 bottom
U$296  [QWIIC_4MM]  110.74,57.18 0 top
U$297  [#GND#0]  115.82,52.58 90 top
U$298  [#GND#0]  103.89,72.14 0 top
U$299  [#GND#0]  123.44,91.69 270 bottom
U$300  [#GND#1]  123.44,91.69 90 top
U$301  [#GND#1]  103.89,72.14 0 bottom
U$302  [#GND#1]  115.82,52.58 270 bottom
U$303  [#TXD2#0]  103.89,82.3 0 top
U$304  [#TXD2#0]  125.98,52.58 90 top
U$305  [#TXD2#3]  125.98,52.58 270 bottom
U$306  [#TXD2#3]  103.89,82.3 0 bottom
U$307  [#RXD2#0]  123.44,52.58 90 top
U$308  [#RXD2#0]  103.89,79.76 0 top
U$309  [#RXD2#3]  103.89,79.76 0 bottom
U$310  [#RXD2#3]  123.44,52.58 270 bottom
U$311  [BLK0]  103.5,70.36 0 top
U$312  [BLK0]  103.5,70.36 0 bottom
U$313  [GRN0]  103.63,86.61 0 top
U$314  [GRN0]  103.5,86.61 0 bottom
U$315  [#5V#0]  118.36,52.58 90 top
U$316  [#5V#6]  118.36,52.58 270 bottom
U$317  [#3V3#0]  120.9,52.58 90 top
U$318  [#3V3#0]  120.9,91.69 270 bottom
U$319  [#3V3#4]  120.9,52.58 270 bottom
U$320  [#3V3#4]  120.9,91.69 90 top
U$321  [#SDA##CS##0]  128.52,52.58 90 top
U$322  [#SDA##CS##0]  118.36,91.69 270 bottom
U$323  [#SDA##CS##1]  128.52,52.58 270 bottom
U$324  [#SDA##CS##1]  118.36,91.69 90 top
U$325  [#SCL#SCK#0]  136.14,52.58 90 top
U$326  [#SCL#SCK#0]  115.82,91.69 270 bottom
U$327  [#SCL#SCK#1]  115.82,91.69 90 top
U$328  [#SCL#SCK#1]  136.14,52.58 270 bottom
U$329  [##SAFEBOOT##0]  131.06,91.69 90 top
U$330  [##SAFEBOOT##1]  131.06,91.69 270 bottom
U$331  [##RESET##0]  133.6,91.69 90 top
U$332  [##RESET##1]  133.6,91.69 270 bottom
U$333  [#EXT_INT#0]  136.14,91.69 90 top
U$334  [#EXT_INT#1]  136.14,91.69 270 bottom
U$335  [PWR0]  141.22,70.87 0 top
U$336  [#PWR#0]  143.13,67.69 270 bottom
U$337  [#SPI#0]  124.21,64.14 270 bottom
U$338  [#I�C#0]  123.95,79.76 270 bottom
U$339  [#SHLD#0]  105.41,63.25 270 bottom
U$340  [NEO#D9S0]  142.49,60.71 90 top
U$341  [NEO#D9S0]  118.36,70.87 270 bottom
U$342  [#TXD1#POCI#0]  131.06,52.58 90 top
U$343  [#TXD1#POCI#0]  125.98,91.69 270 bottom
U$344  [#TXD1#POCI#2]  125.98,91.69 90 top
U$345  [#TXD1#POCI#2]  131.06,52.58 270 bottom
U$346  [#RXD1#PICO#0]  133.6,52.58 90 top
U$347  [#RXD1#PICO#0]  128.52,91.69 270 bottom
U$348  [#RXD1#PICO#2]  128.52,91.69 90 top
U$349  [#RXD1#PICO#2]  133.6,52.58 270 bottom
U$350  [QWIIC_4MM]  110.74,87.02 0 top
U$351  [#3V3#0]  103.89,77.22 0 top
U$352  [#3V3#0]  110.87,77.22 0 bottom
U$353  [#ANT_PWR#0]  138.68,91.69 90 top
U$354  [#ANT_PWR#1]  138.68,91.69 270 bottom

## Library data of the parts
3V1-3V6 I2C I2C1-I2C5 PWR\ PWR\1-PWR\5 SHLD SHLD1-SHLD5 SPI SPI1-SPI5 = SparkFun-Jumpers
C1 C7 C11 C14 C18 C21 C25 C28 C32 C35 C39 C42 = SparkFun-Capacitors; PROD_ID: CAP-08913
C2-C4 C6 C8 C10 C12 C13 C15 C17 C19 C20 C22 C24 C26 C27 C29 C31 C33 C34 C36 C38 C40 C41 = SparkFun-Capacitors; PROD_ID: CAP-00868
C5 C9 C16 C23 C30 C37 = SparkFun-Capacitors; PROD_ID: CAP-00810
D1 D4 D6 D8 D10 D12 = SparkFun-DiscreteSemi; DIGIKEY_PART: PESD0402-140CT-ND; MOUSE_PART: 650-PESD0402-140; PROD_ID: DIO-15359
D2 D3 D5 D7 D9 D11 = SparkFun-IC-Power; PROD_ID: DIO-14084
E$1-E$4 LOGO1-LOGO24 U$14 U$38 U$60 U$114 U$119 U$173 U$178 U$232 U$237 U$291 U$296 U$350 = SparkFun-Aesthetics
E$5 E$6 = SparkFun-Retired
FB1-FB6 = SparkFun-Coils; PROD_ID: NDUC-13805
J1 J11 J18 J25 J32 J39 = SparkFun-RF; PROD_ID: CONN-08289
J2 J4 J6 J9 J15 J16 J22 J23 J29 J30 J36 J37 = SparkFun-Connectors; PROD_ID: CONN-13694
J3 J10 J17 J24 J31 J38 = SparkFun-Connectors; PROD_ID: CONN-14122
J5 J12 J19 J26 J33 J40 = SparkFun-Connectors; PROD_ID: CONN-08437
J7 J8 J13 J14 J20 J21 J27 J28 J34 J35 J41 J42 = SparkFun-Connectors
JP1-JP43 JP61 JP71 JP81 JP91 JP101 = SparkFun
L1-L6 = SparkFun-Coils
LED1-LED6 = SparkFun-LED; PROD_ID: DIO-00819
R1 R21 R35 R49 R63 R77 = SparkFun-Resistors; PROD_ID: RES-07856
R2-R6 R11 R15 R16 R19 R20 R27-R30 R33 R34 R41-R44 R47 R48 R55-R58 R61 R62 R69-R72 R75 R76 R83 R84 = SparkFun-Resistors; PROD_ID: RES-08270
R7 R8 R17 R18 R31 R32 R45 R46 R59 R60 R73 R74 = SparkFun-Resistors; PROD_ID: RES-08272
R9 R10 R22 R23 R36 R37 R50 R51 R64 R65 R78 R79 = SparkFun-Resistors; PROD_ID: RES-09334
R12 R13 R25 R26 R39 R40 R53 R54 R67 R68 R81 R82 = SparkFun-Resistors; PROD_ID: RES-12083
R14 R24 R38 R52 R66 R80 = SparkFun-Resistors; PROD_ID: RES-12581
U1 U4 U6 U8 U10 U12 = SparkFun-GPS; PROD_ID: IC-16579
U2 U3 U5 U7 U9 U11 = SparkFun-IC-Power; PROD_ID: VREG-12457
U$1-U$13 U$15-U$37 U$39-U$59 U$61-U$113 U$115-U$118 U$120-U$172 U$174-U$177 U$179-U$231 U$233-U$236 U$238-U$290 U$292-U$295 U$297-U$349 U$351-U$354 = output

## Nets
3.3V [3.3V]: 3V3.2 C3.1 C4.1 C5.2 C6.1 I2C.2 J2.2 J4.2 J7.3 J8.3 PWR\.2 U1.7 U1.22 U1.23 U2.5
3.3V1 [3.3V]: 3V1.2 C8.1 C9.2 C12.1 C13.1 I2C1.2 J6.2 J9.2 J13.3 J14.3 PWR\1.2 U3.5 U4.7 U4.22 U4.23
3.3V2 [3.3V]: 3V2.2 C15.1 C16.2 C19.1 C20.1 I2C2.2 J15.2 J16.2 J20.3 J21.3 PWR\2.2 U5.5 U6.7 U6.22 U6.23
3.3V3 [3.3V]: 3V4.2 C22.1 C23.2 C26.1 C27.1 I2C3.2 J22.2 J23.2 J27.3 J28.3 PWR\3.2 U7.5 U8.7 U8.22 U8.23
3.3V4 [3.3V]: 3V5.2 C29.1 C30.2 C33.1 C34.1 I2C4.2 J29.2 J30.2 J34.3 J35.3 PWR\4.2 U9.5 U10.7 U10.22 U10.23
3.3V5 [3.3V]: 3V6.2 C36.1 C37.2 C40.1 C41.1 I2C5.2 J36.2 J37.2 J41.3 J42.3 PWR\5.2 U11.5 U12.7 U12.22 U12.23
5V: C2.1 D2.5 J3.VBUS1 J3.VBUS2 J8.2 U2.1 U2.3
5V1: C10.1 D3.5 J10.VBUS1 J10.VBUS2 J13.2 U3.1 U3.3
5V2: C17.1 D5.5 J17.VBUS1 J17.VBUS2 J20.2 U5.1 U5.3
5V3: C24.1 D7.5 J24.VBUS1 J24.VBUS2 J27.2 U7.1 U7.3
5V4: C31.1 D9.5 J31.VBUS1 J31.VBUS2 J34.2 U9.1 U9.3
5V5: C38.1 D11.5 J38.VBUS1 J38.VBUS2 J41.2 U11.1 U11.3
!RESET!: J7.8 U1.8
!RESET!1: J14.8 U4.8
!RESET!2: J21.8 U6.8
!RESET!3: J28.8 U8.8
!RESET!4: J35.8 U10.8
!RESET!5: J42.8 U12.8
!SAFEBOOT!: J7.7 U1.1
!SAFEBOOT!1: J14.7 U4.1
!SAFEBOOT!2: J21.7 U6.1
!SAFEBOOT!3: J28.7 U8.1
!SAFEBOOT!4: J35.7 U10.1
!SAFEBOOT!5: J42.7 U12.1
ANT: C7.2 U1.11
ANT1: C14.2 U4.11
ANT2: C21.2 U6.11
ANT3: C28.2 U8.11
ANT4: C35.2 U10.11
ANT5: C42.2 U12.11
ANT_PWR: J7.10 L1.2
ANT_PWR1: J14.10 L2.2
ANT_PWR2: J21.10 L3.2
ANT_PWR3: J28.10 L4.2
ANT_PWR4: J35.10 L5.2
ANT_PWR5: J42.10 L6.2
ANT_VCC: C1.1 FB1.2 R14.1
ANT_VCC1: C11.1 FB2.2 R24.1
ANT_VCC2: C18.1 FB3.2 R38.1
ANT_VCC3: C25.1 FB4.2 R52.1
ANT_VCC4: C32.1 FB5.2 R66.1
ANT_VCC5: C39.1 FB6.2 R80.1
D+: D2.6 R9.1
D+1: D3.6 R22.1
D+2: D5.6 R36.1
D+3: D7.6 R50.1
D+4: D9.6 R64.1
D+5: D11.6 R78.1
D-: D2.4 R10.1
D-1: D3.4 R23.1
D-2: D5.4 R37.1
D-3: D7.4 R51.1
D-4: D9.4 R65.1
D-5: D11.4 R79.1
D_SEL: SPI.2 U1.2
D_SEL1: SPI1.2 U4.2
D_SEL2: SPI2.2 U6.2
D_SEL3: SPI3.2 U8.2
D_SEL4: SPI4.2 U10.2
D_SEL5: SPI5.2 U12.2
EXT_INT: J7.9 U1.17
EXT_INT1: J14.9 U4.17
EXT_INT2: J21.9 U6.17
EXT_INT3: J28.9 U8.17
EXT_INT4: J35.9 U10.17
EXT_INT5: J42.9 U12.17
GND: C1.2 C2.2 C3.2 C4.2 C5.1 C6.2 D1.2 D2.2 J1.GND@0 J1.GND@1 J1.GND@2 J1.GND@3 J2.1 J3.GND J3.GND2 J4.1 J5.1 J7.4 J8.1 LED1.C R12.1 R13.1 SHLD.1 SPI.1 U1.10 U1.12 U1.13 U1.24 U2.2
GND1: C8.2 C9.1 C10.2 C11.2 C12.2 C13.2 D3.2 D4.2 J6.1 J9.1 J10.GND J10.GND2 J11.GND@0 J11.GND@1 J11.GND@2 J11.GND@3 J12.1 J13.1 J14.4 LED2.C R25.1 R26.1 SHLD1.1 SPI1.1 U3.2 U4.10 U4.12 U4.13 U4.24
GND2: C15.2 C16.1 C17.2 C18.2 C19.2 C20.2 D5.2 D6.2 J15.1 J16.1 J17.GND J17.GND2 J18.GND@0 J18.GND@1 J18.GND@2 J18.GND@3 J19.1 J20.1 J21.4 LED3.C R39.1 R40.1 SHLD2.1 SPI2.1 U5.2 U6.10 U6.12 U6.13 U6.24
GND3: C22.2 C23.1 C24.2 C25.2 C26.2 C27.2 D7.2 D8.2 J22.1 J23.1 J24.GND J24.GND2 J25.GND@0 J25.GND@1 J25.GND@2 J25.GND@3 J26.1 J27.1 J28.4 LED4.C R53.1 R54.1 SHLD3.1 SPI3.1 U7.2 U8.10 U8.12 U8.13 U8.24
GND4: C29.2 C30.1 C31.2 C32.2 C33.2 C34.2 D9.2 D10.2 J29.1 J30.1 J31.GND J31.GND2 J32.GND@0 J32.GND@1 J32.GND@2 J32.GND@3 J33.1 J34.1 J35.4 LED5.C R67.1 R68.1 SHLD4.1 SPI4.1 U9.2 U10.10 U10.12 U10.13 U10.24
GND5: C36.2 C37.1 C38.2 C39.2 C40.2 C41.2 D11.2 D12.2 J36.1 J37.1 J38.GND J38.GND2 J39.GND@0 J39.GND@1 J39.GND@2 J39.GND@3 J40.1 J41.1 J42.4 LED6.C R81.1 R82.1 SHLD5.1 SPI5.1 U11.2 U12.10 U12.12 U12.13 U12.24
N$1: PWR\.1 R1.2
N$2: R3.1 U1.20
N$3: R2.1 U1.18
N$4: R4.1 U1.19
N$5: I2C.1 R8.2
N$6: R6.1 U1.21
N$7: J3.B5 R12.2
N$8: I2C.3 R7.2
N$9: J3.A5 R13.2
N$10: LED1.A R1.1
N$11: R9.2 U1.6
N$12: R10.2 U1.5
N$13: 3V3.1 J5.3
N$14: R11.1 U1.3
N$15: R5.1 U1.4
N$16: I2C1.1 R18.2
N$17: I2C1.3 R17.2
N$18: LED2.A R21.1
N$19: R22.2 U4.6
N$20: R23.2 U4.5
N$21: PWR\1.1 R21.2
N$22: J10.B5 R25.2
N$23: J10.A5 R26.2
N$24: R27.1 U4.3
N$25: R28.1 U4.4
N$26: R15.1 U4.20
N$27: R16.1 U4.21
N$28: R19.1 U4.18
N$29: R20.1 U4.19
N$30: 3V1.1 J12.3
N$31: I2C2.1 R32.2
N$32: I2C2.3 R31.2
N$33: LED3.A R35.1
N$34: R36.2 U6.6
N$35: R37.2 U6.5
N$36: PWR\2.1 R35.2
N$37: J17.B5 R39.2
N$38: J17.A5 R40.2
N$39: R41.1 U6.3
N$40: R42.1 U6.4
N$41: R29.1 U6.20
N$42: R30.1 U6.21
N$43: R33.1 U6.18
N$44: R34.1 U6.19
N$45: 3V2.1 J19.3
N$46: I2C3.1 R46.2
N$47: I2C3.3 R45.2
N$48: LED4.A R49.1
N$49: R50.2 U8.6
N$50: R51.2 U8.5
N$51: PWR\3.1 R49.2
N$52: J24.B5 R53.2
N$53: J24.A5 R54.2
N$54: R55.1 U8.3
N$55: R56.1 U8.4
N$56: R43.1 U8.20
N$57: R44.1 U8.21
N$58: R47.1 U8.18
N$59: R48.1 U8.19
N$60: 3V4.1 J26.3
N$61: I2C4.1 R60.2
N$62: I2C4.3 R59.2
N$63: LED5.A R63.1
N$64: R64.2 U10.6
N$65: R65.2 U10.5
N$66: PWR\4.1 R63.2
N$67: J31.B5 R67.2
N$68: J31.A5 R68.2
N$69: R69.1 U10.3
N$70: R70.1 U10.4
N$71: R57.1 U10.20
N$72: R58.1 U10.21
N$73: R61.1 U10.18
N$74: R62.1 U10.19
N$75: 3V5.1 J33.3
N$76: I2C5.1 R74.2
N$77: I2C5.3 R73.2
N$78: LED6.A R77.1
N$79: R78.2 U12.6
N$80: R79.2 U12.5
N$81: PWR\5.1 R77.2
N$82: J38.B5 R81.2
N$83: J38.A5 R82.2
N$84: R83.1 U12.3
N$85: R84.1 U12.4
N$86: R71.1 U12.20
N$87: R72.1 U12.21
N$88: R75.1 U12.18
N$89: R76.1 U12.19
N$90: 3V6.1 J40.3
RXD1: J12.4 J13.4 R28.2
RXD1/PICO: J7.6 J8.8 R6.2
RXD1/PICO1: J13.8 J14.6 R16.2
RXD1/PICO2: J20.8 J21.6 R30.2
RXD1/PICO3: J27.8 J28.6 R44.2
RXD1/PICO4: J34.8 J35.6 R58.2
RXD1/PICO5: J41.8 J42.6 R72.2
RXD2: J5.4 J8.4 R5.2
RXD3: J19.4 J20.4 R42.2
RXD4: J26.4 J27.4 R56.2
RXD5: J33.4 J34.4 R70.2
RXD6: J40.4 J41.4 R84.2
SCL/SCK: J2.4 J4.4 J7.1 J8.9 R4.2 R7.1
SCL/SCK1: J6.4 J9.4 J13.9 J14.1 R17.1 R20.2
SCL/SCK2: J15.4 J16.4 J20.9 J21.1 R31.1 R34.2
SCL/SCK3: J22.4 J23.4 J27.9 J28.1 R45.1 R48.2
SCL/SCK4: J29.4 J30.4 J34.9 J35.1 R59.1 R62.2
SCL/SCK5: J36.4 J37.4 J41.9 J42.1 R73.1 R76.2
SDA/!CS!: J2.3 J4.3 J7.2 J8.6 R2.2 R8.1
SDA/!CS!1: J6.3 J9.3 J13.6 J14.2 R18.1 R19.2
SDA/!CS!2: J15.3 J16.3 J20.6 J21.2 R32.1 R33.2
SDA/!CS!3: J22.3 J23.3 J27.6 J28.2 R46.1 R47.2
SDA/!CS!4: J29.3 J30.3 J34.6 J35.2 R60.1 R61.2
SDA/!CS!5: J36.3 J37.3 J41.6 J42.2 R74.1 R75.2
SHIELD: J3.SHLD1 J3.SHLD2 J3.SHLD3 J3.SHLD4 SHLD.2
SHIELD1: J10.SHLD1 J10.SHLD2 J10.SHLD3 J10.SHLD4 SHLD1.2
SHIELD2: J17.SHLD1 J17.SHLD2 J17.SHLD3 J17.SHLD4 SHLD2.2
SHIELD3: J24.SHLD1 J24.SHLD2 J24.SHLD3 J24.SHLD4 SHLD3.2
SHIELD4: J31.SHLD1 J31.SHLD2 J31.SHLD3 J31.SHLD4 SHLD4.2
SHIELD5: J38.SHLD1 J38.SHLD2 J38.SHLD3 J38.SHLD4 SHLD5.2
SMA: C7.1 D1.1 FB1.1 J1.SIG L1.1
SMA1: C14.1 D4.1 FB2.1 J11.SIG L2.1
SMA2: C21.1 D6.1 FB3.1 J18.SIG L3.1
SMA3: C28.1 D8.1 FB4.1 J25.SIG L4.1
SMA4: C35.1 D10.1 FB5.1 J32.SIG L5.1
SMA5: C42.1 D12.1 FB6.1 J39.SIG L6.1
TXD1: J12.5 J13.5 R27.2
TXD1/POCI: J7.5 J8.7 R3.2
TXD1/POCI1: J13.7 J14.5 R15.2
TXD1/POCI2: J20.7 J21.5 R29.2
TXD1/POCI3: J27.7 J28.5 R43.2
TXD1/POCI4: J34.7 J35.5 R57.2
TXD1/POCI5: J41.7 J42.5 R71.2
TXD2: J5.5 J8.5 R11.2
TXD3: J19.5 J20.5 R41.2
TXD4: J26.5 J27.5 R55.2
TXD5: J33.5 J34.5 R69.2
TXD6: J40.5 J41.5 R83.2
USB_D+: D2.1 J3.A6 J3.B6
USB_D+1: D3.1 J10.A6 J10.B6
USB_D+2: D5.1 J17.A6 J17.B6
USB_D+3: D7.1 J24.A6 J24.B6
USB_D+4: D9.1 J31.A6 J31.B6
USB_D+5: D11.1 J38.A6 J38.B6
USB_D-: D2.3 J3.A7 J3.B7
USB_D-1: D3.3 J10.A7 J10.B7
USB_D-2: D5.3 J17.A7 J17.B7
USB_D-3: D7.3 J24.A7 J24.B7
USB_D-4: D9.3 J31.A7 J31.B7
USB_D-5: D11.3 J38.A7 J38.B7
VCC_RF: R14.2 U1.9
VCC_RF1: R24.2 U4.9
VCC_RF2: R38.2 U6.9
VCC_RF3: R52.2 U8.9
VCC_RF4: R66.2 U10.9
VCC_RF5: R80.2 U12.9

## Tracks (layer width: path | path; a pad name or v marks a point on that pad's centre or on a via)
3.3V  (via drill 0.3)
  Top 0.508: 20.7,20.49 20.7,17.53 21.72,16.51 24.13,16.51 25.53,17.91 30.23,17.91 30.76,17.37 U2.5 30.76,16.1 31.11,15.75 31.5,15.75 32.09,15.15 C4.1 | C4.1 C5.2 40.55,15.15 43.43,18.03 43.43,24 | J4.2 17.79,10.66 18.29,10.16 27.94,10.16 | 43.43,24 43.43,26.04 42.01,27.46 39.14,27.46 38.99,27.3 38.99,26.46 | C4.1 32.89,14.26 32.35,13.72 29.46,13.72 28.45,12.7 28.45,10.67 | 38.99,26.46 C6.1 | 38.99,26.46 38.14,26.46 37.7,26.02 U1.7 | U1.23 22.73,20.52 | 20.7,20.49 20.21,20.98 18.01,20.98 17.4,21.59 17.4,31.75 | U1.22 24.33,21.59 22.99,21.59 22.73,21.34 22.73,20.52 | 22.73,20.52 22.71,20.54 C3.1 21.67,20.49 20.7,20.49 | v15.75,32.26 v16.38,32.26 16.89,32.26 | v46.23,24 43.43,24 | 17.4,31.75 16.89,32.26 | 17.4,32.77 16.89,32.26 | 17.4,32.77 17.4,38.86 18.85,40.31 18.85,44.9 J2.2 18.79,46.47 19.43,47.12 26.8,47.12 J7.3 | 17.4,32.77 17.4,31.75 | 27.94,10.16 28.45,10.67 | 27.94,10.16 28.45,9.65 | J8.3 28.45,9.65 | 28.45,9.65 28.45,10.67
  Bottom 0.508: 3V3.2 14.49,33.53 15.75,32.27 v15.75,32.26 v16.38,32.26 | PWR\.2 v46.23,24 | I2C.2 28.7,36.07 27.69,37.08 27.69,39.12 28.45,39.88 J7.3
3.3V1  (via drill 0.3)
  Top 0.508: 66.93,20.49 66.93,17.53 67.94,16.51 70.36,16.51 71.75,17.91 76.45,17.91 76.99,17.37 U3.5 76.99,16.1 77.34,15.75 77.72,15.75 78.32,15.15 C8.1 | C8.1 C9.2 86.78,15.15 89.66,18.03 89.66,24 | J9.2 64.02,10.66 64.52,10.16 74.17,10.16 | 89.66,24 89.66,26.04 88.24,27.46 85.37,27.46 85.22,27.3 85.22,26.46 | C8.1 79.12,14.26 78.57,13.72 75.69,13.72 74.68,12.7 74.68,10.67 | 85.22,26.46 C13.1 | 85.22,26.46 84.37,26.46 83.93,26.02 U4.7 | U4.23 68.96,20.52 | 66.93,20.49 66.44,20.98 64.24,20.98 63.63,21.59 63.63,31.75 | U4.22 70.55,21.59 69.22,21.59 68.96,21.34 68.96,20.52 | 68.96,20.52 68.94,20.54 C12.1 67.9,20.49 66.93,20.49 | v61.98,32.26 v62.61,32.26 63.12,32.26 | v92.46,24 89.66,24 | 63.63,31.75 63.12,32.26 | 63.63,32.77 63.12,32.26 | 63.63,32.77 63.63,38.86 65.08,40.31 65.08,44.9 J6.2 65.02,46.47 65.66,47.12 73.03,47.12 J14.3 | 63.63,32.77 63.63,31.75 | 74.17,10.16 74.68,10.67 | 74.17,10.16 74.68,9.65 | J13.3 74.68,9.65 | 74.68,9.65 74.68,10.67
  Bottom 0.508: 3V1.2 60.72,33.53 61.98,32.27 v61.98,32.26 v62.61,32.26 | PWR\1.2 v92.46,24 | I2C1.2 74.93,36.07 73.91,37.08 73.91,39.12 74.68,39.88 J14.3
3.3V2  (via drill 0.3)
  Top 0.508: 113.16,20.49 113.16,17.53 114.17,16.51 116.59,16.51 117.98,17.91 122.68,17.91 123.22,17.37 U5.5 123.22,16.1 123.57,15.75 123.95,15.75 124.55,15.15 C15.1 | C15.1 C16.2 133.01,15.15 135.89,18.03 135.89,24 | J16.2 110.24,10.66 110.74,10.16 120.4,10.16 | 135.89,24 135.89,26.04 134.47,27.46 131.59,27.46 131.44,27.3 131.44,26.46 | C15.1 125.35,14.26 124.8,13.72 121.92,13.72 120.9,12.7 120.9,10.67 | 131.44,26.46 C20.1 | 131.44,26.46 130.59,26.46 130.16,26.02 U6.7 | U6.23 115.19,20.52 | 113.16,20.49 112.67,20.98 110.47,20.98 109.85,21.59 109.85,31.75 | U6.22 116.78,21.59 115.44,21.59 115.19,21.34 115.19,20.52 | 115.19,20.52 115.17,20.54 C19.1 114.13,20.49 113.16,20.49 | v108.2,32.26 v108.84,32.26 109.35,32.26 | v138.68,24 135.89,24 | 109.85,31.75 109.35,32.26 | 109.85,32.77 109.35,32.26 | 109.85,32.77 109.85,38.86 111.31,40.31 111.31,44.9 J15.2 111.24,46.47 111.89,47.12 119.25,47.12 J21.3 | 109.85,32.77 109.85,31.75 | 120.4,10.16 120.9,10.67 | 120.4,10.16 120.9,9.65 | J20.3 120.9,9.65 | 120.9,9.65 120.9,10.67
  Bottom 0.508: 3V2.2 106.95,33.53 108.2,32.27 v108.2,32.26 v108.84,32.26 | PWR\2.2 v138.68,24 | I2C2.2 121.16,36.07 120.14,37.08 120.14,39.12 120.9,39.88 J21.3
3.3V3  (via drill 0.3)
  Top 0.508: 20.7,64.18 20.7,61.21 21.72,60.2 24.13,60.2 25.53,61.59 30.23,61.59 30.76,61.06 U7.5 30.76,59.79 31.11,59.44 31.5,59.44 32.09,58.84 C22.1 | C22.1 C23.2 40.55,58.84 43.43,61.72 43.43,67.69 | J23.2 17.79,54.35 18.29,53.85 27.94,53.85 | 43.43,67.69 43.43,69.72 42.01,71.14 39.14,71.14 38.99,70.99 38.99,70.14 | C22.1 32.89,57.95 32.35,57.4 29.46,57.4 28.45,56.39 28.45,54.36 | 38.99,70.14 C27.1 | 38.99,70.14 38.14,70.14 37.7,69.7 U8.7 | U8.23 22.73,64.2 | 20.7,64.18 20.21,64.67 18.01,64.67 17.4,65.28 17.4,75.44 | U8.22 24.33,65.28 22.99,65.28 22.73,65.02 22.73,64.2 | 22.73,64.2 22.71,64.22 C26.1 21.67,64.18 20.7,64.18 | v15.75,75.95 v16.38,75.95 16.89,75.95 | v46.23,67.69 43.43,67.69 | 17.4,75.44 16.89,75.95 | 17.4,76.45 16.89,75.95 | 17.4,76.45 17.4,82.55 18.85,84 18.85,88.58 J22.2 18.79,90.16 19.43,90.81 26.8,90.81 J28.3 | 17.4,76.45 17.4,75.44 | 27.94,53.85 28.45,54.36 | 27.94,53.85 28.45,53.34 | J27.3 28.45,53.34 | 28.45,53.34 28.45,54.36
  Bottom 0.508: 3V4.2 14.49,77.22 v15.75,75.96 v15.75,75.95 v16.38,75.95 | PWR\3.2 v46.23,67.69 | I2C3.2 28.7,79.76 27.69,80.77 27.69,82.8 28.45,83.57 J28.3
3.3V4  (via drill 0.3)
  Top 0.508: 66.93,64.18 66.93,61.21 67.94,60.2 70.36,60.2 71.75,61.59 76.45,61.59 76.99,61.06 U9.5 76.99,59.79 77.34,59.44 77.72,59.44 78.32,58.84 C29.1 | C29.1 C30.2 86.78,58.84 89.66,61.72 89.66,67.69 | J30.2 64.02,54.35 64.52,53.85 74.17,53.85 | 89.66,67.69 89.66,69.72 88.24,71.14 85.37,71.14 85.22,70.99 85.22,70.14 | C29.1 79.12,57.95 78.57,57.4 75.69,57.4 74.68,56.39 74.68,54.36 | 85.22,70.14 C34.1 | 85.22,70.14 84.37,70.14 83.93,69.7 U10.7 | U10.23 68.96,64.2 | 66.93,64.18 66.44,64.67 64.24,64.67 63.63,65.28 63.63,75.44 | U10.22 70.55,65.28 69.22,65.28 68.96,65.02 68.96,64.2 | 68.96,64.2 68.94,64.22 C33.1 67.9,64.18 66.93,64.18 | v61.98,75.95 v62.61,75.95 63.12,75.95 | v92.46,67.69 89.66,67.69 | 63.63,75.44 63.12,75.95 | 63.63,76.45 63.12,75.95 | 63.63,76.45 63.63,82.55 65.08,84 65.08,88.58 J29.2 65.02,90.16 65.66,90.81 73.03,90.81 J35.3 | 63.63,76.45 63.63,75.44 | 74.17,53.85 74.68,54.36 | 74.17,53.85 74.68,53.34 | J34.3 74.68,53.34 | 74.68,53.34 74.68,54.36
  Bottom 0.508: 3V5.2 60.72,77.22 v61.98,75.96 v61.98,75.95 v62.61,75.95 | PWR\4.2 v92.46,67.69 | I2C4.2 74.93,79.76 73.91,80.77 73.91,82.8 74.68,83.57 J35.3
3.3V5  (via drill 0.3)
  Top 0.508: 113.16,64.18 113.16,61.21 114.17,60.2 116.59,60.2 117.98,61.59 122.68,61.59 123.22,61.06 U11.5 123.22,59.79 123.57,59.44 123.95,59.44 124.55,58.84 C36.1 | C36.1 C37.2 133.01,58.84 135.89,61.72 135.89,67.69 | J37.2 110.24,54.35 110.74,53.85 120.4,53.85 | 135.89,67.69 135.89,69.72 134.47,71.14 131.59,71.14 131.44,70.99 131.44,70.14 | C36.1 125.35,57.95 124.8,57.4 121.92,57.4 120.9,56.39 120.9,54.36 | 131.44,70.14 C41.1 | 131.44,70.14 130.59,70.14 130.16,69.7 U12.7 | U12.23 115.19,64.2 | 113.16,64.18 112.67,64.67 110.47,64.67 109.85,65.28 109.85,75.44 | U12.22 116.78,65.28 115.44,65.28 115.19,65.02 115.19,64.2 | 115.19,64.2 115.17,64.22 C40.1 114.13,64.18 113.16,64.18 | v108.2,75.95 v108.84,75.95 109.35,75.95 | v138.68,67.69 135.89,67.69 | 109.85,75.44 109.35,75.95 | 109.85,76.45 109.35,75.95 | 109.85,76.45 109.85,82.55 111.31,84 111.31,88.58 J36.2 111.24,90.16 111.89,90.81 119.25,90.81 J42.3 | 109.85,76.45 109.85,75.44 | 120.4,53.85 120.9,54.36 | 120.4,53.85 120.9,53.34 | J41.3 120.9,53.34 | 120.9,53.34 120.9,54.36
  Bottom 0.508: 3V6.2 106.95,77.22 v108.2,75.96 v108.2,75.95 v108.84,75.95 | PWR\5.2 v138.68,67.69 | I2C5.2 121.16,79.76 120.14,80.77 120.14,82.8 120.9,83.57 J42.3
5V  (via drill 0.3)
  Top 0.254: D2.5 19.69,19.56 20.04,19.2 20.04,17.11
  Top 0.406: J3.VBUS1 14.9,22.01 13.87,20.98 13.87,18.13 14.9,17.11 J3.VBUS2 20.04,17.11 21.4,15.75 22.97,15.75 | U2.3 29.28,14.8 29.84,15.37 29.84,16.13 29.28,16.7 U2.1 26.44,16.7 C2.1 25.49,16.85 24.38,15.75 23.79,15.75 | v24.26,11.56 v24.26,12.32 23.37,13.21 23.37,15.33 | 23.37,15.33 23.37,15.35 22.97,15.75 | 23.79,15.75 23.37,15.33 | 22.97,15.75 23.79,15.75
  Bottom 0.406: J8.2 25.91,9.91 v24.26,11.56 v24.26,12.32
5V1  (via drill 0.3)
  Top 0.254: D3.5 65.91,19.56 66.27,19.2 66.27,17.11
  Top 0.406: J10.VBUS1 61.12,22.01 60.1,20.98 60.1,18.13 61.12,17.11 J10.VBUS2 66.27,17.11 67.63,15.75 69.2,15.75 | U3.3 75.5,14.8 76.07,15.37 76.07,16.13 75.5,16.7 U3.1 72.67,16.7 C10.1 71.72,16.85 70.61,15.75 70.02,15.75 | v70.48,11.56 v70.48,12.32 69.6,13.21 69.6,15.33 | 69.6,15.33 69.6,15.35 69.2,15.75 | 70.02,15.75 69.6,15.33 | 69.2,15.75 70.02,15.75